# Altium PCB DIO-SMA16-MEZZ.PcbDoc
Units mm, origin at the board's own origin, x right, y up, seen from the top; angles counter-clockwise.
Board outline 65 x 95.5 mm, 4 copper layers (Top Layer, Layer 1, Layer 2, Bottom Layer), stack 0.603 mm thick; 113 components, 66 nets, 358 pads, 139 vias.
Unrouted connection lines stored in the file: 95.
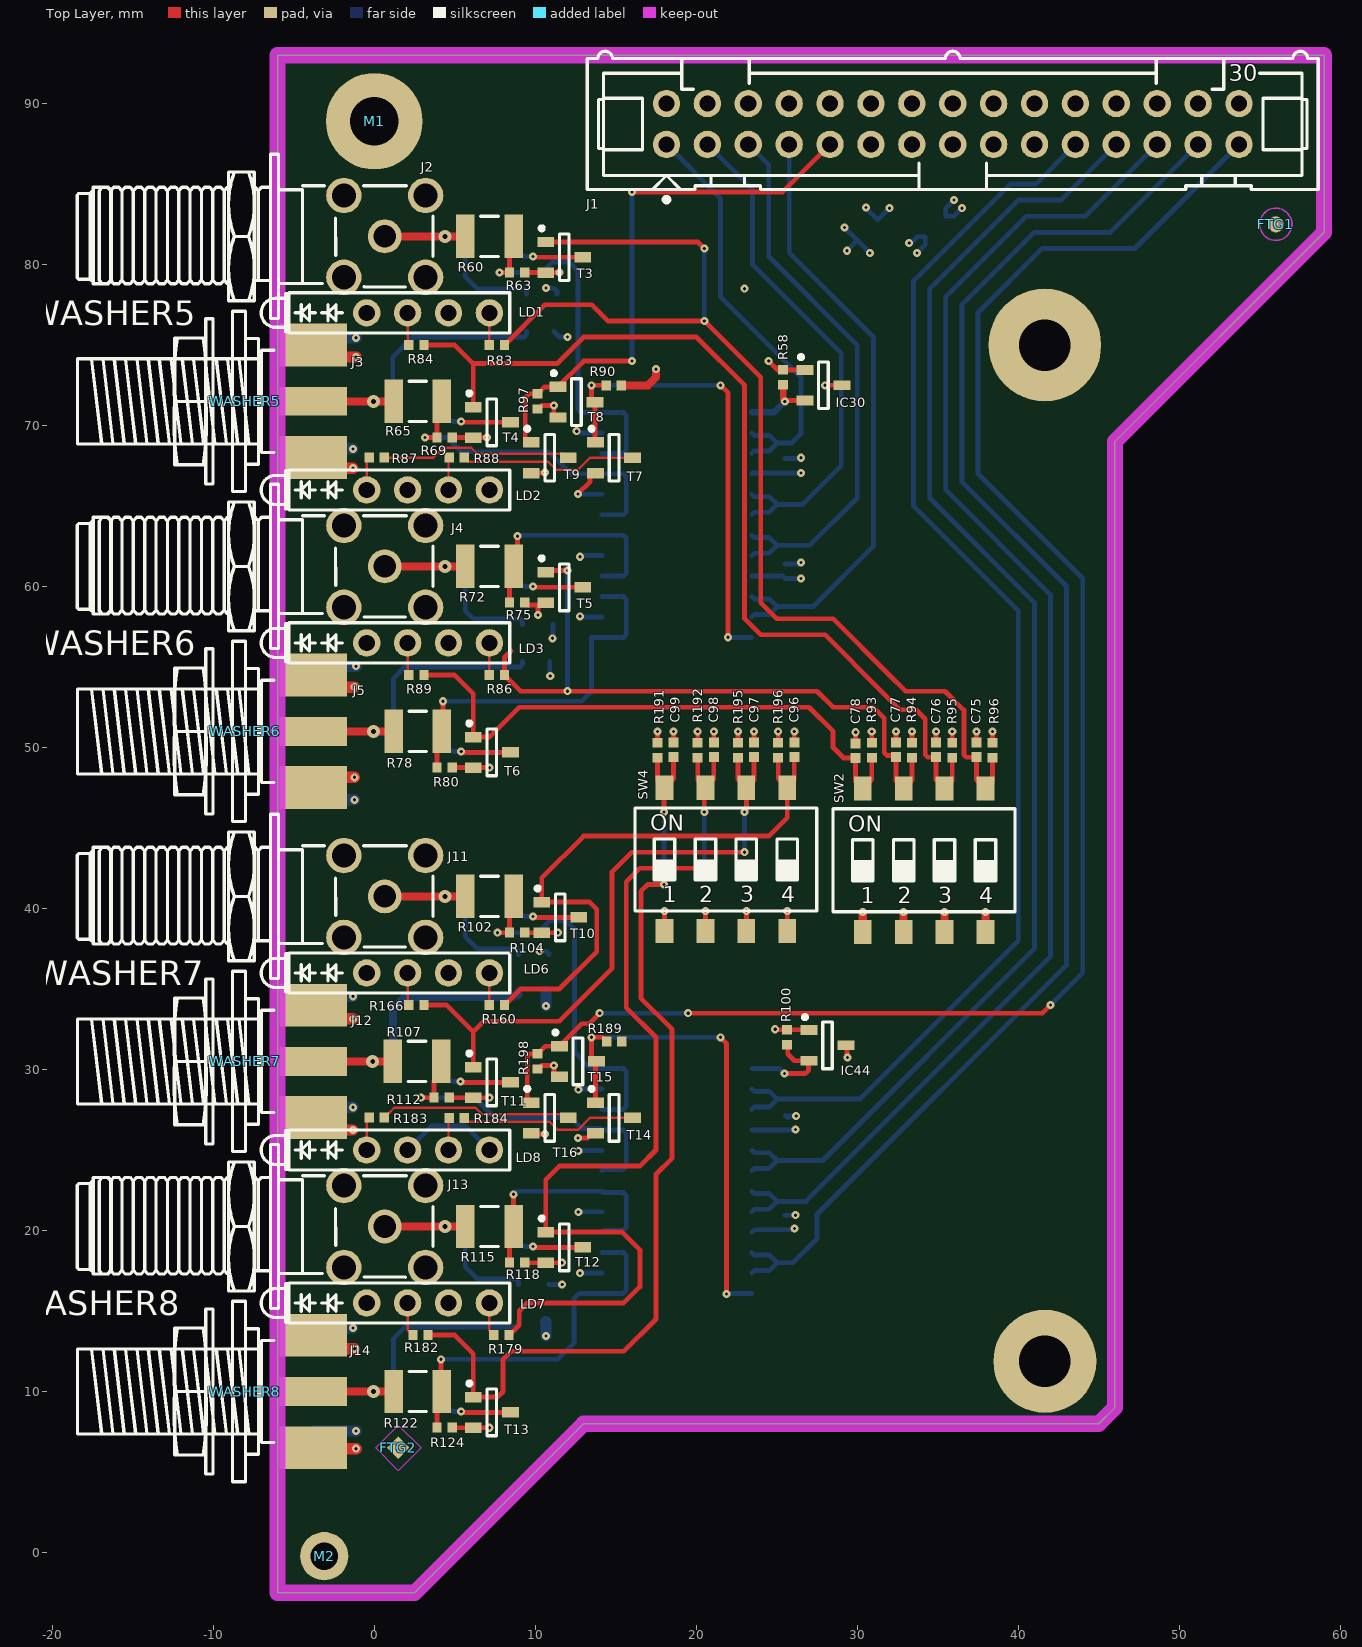
[diagram p0: Top Layer view]
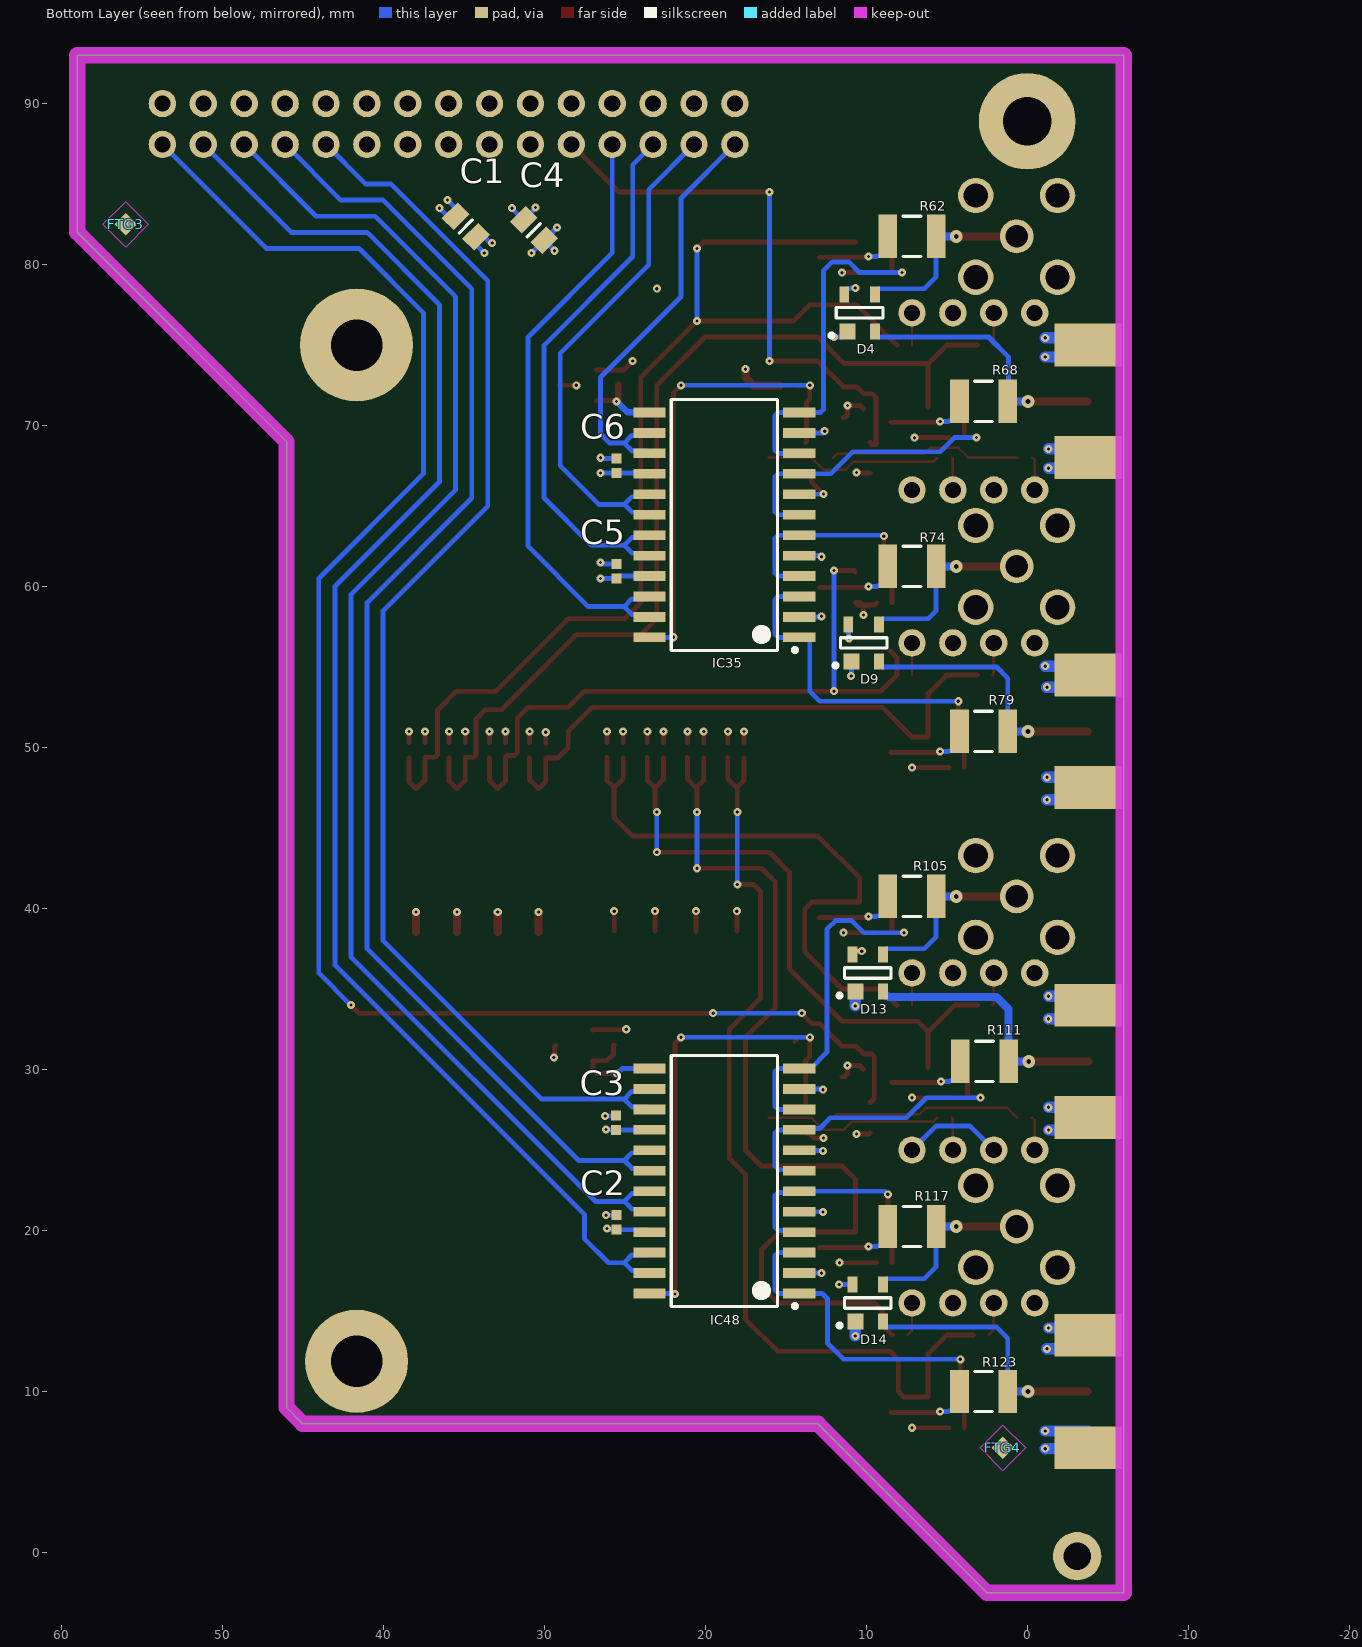
[diagram p1: Bottom Layer view, seen from below]
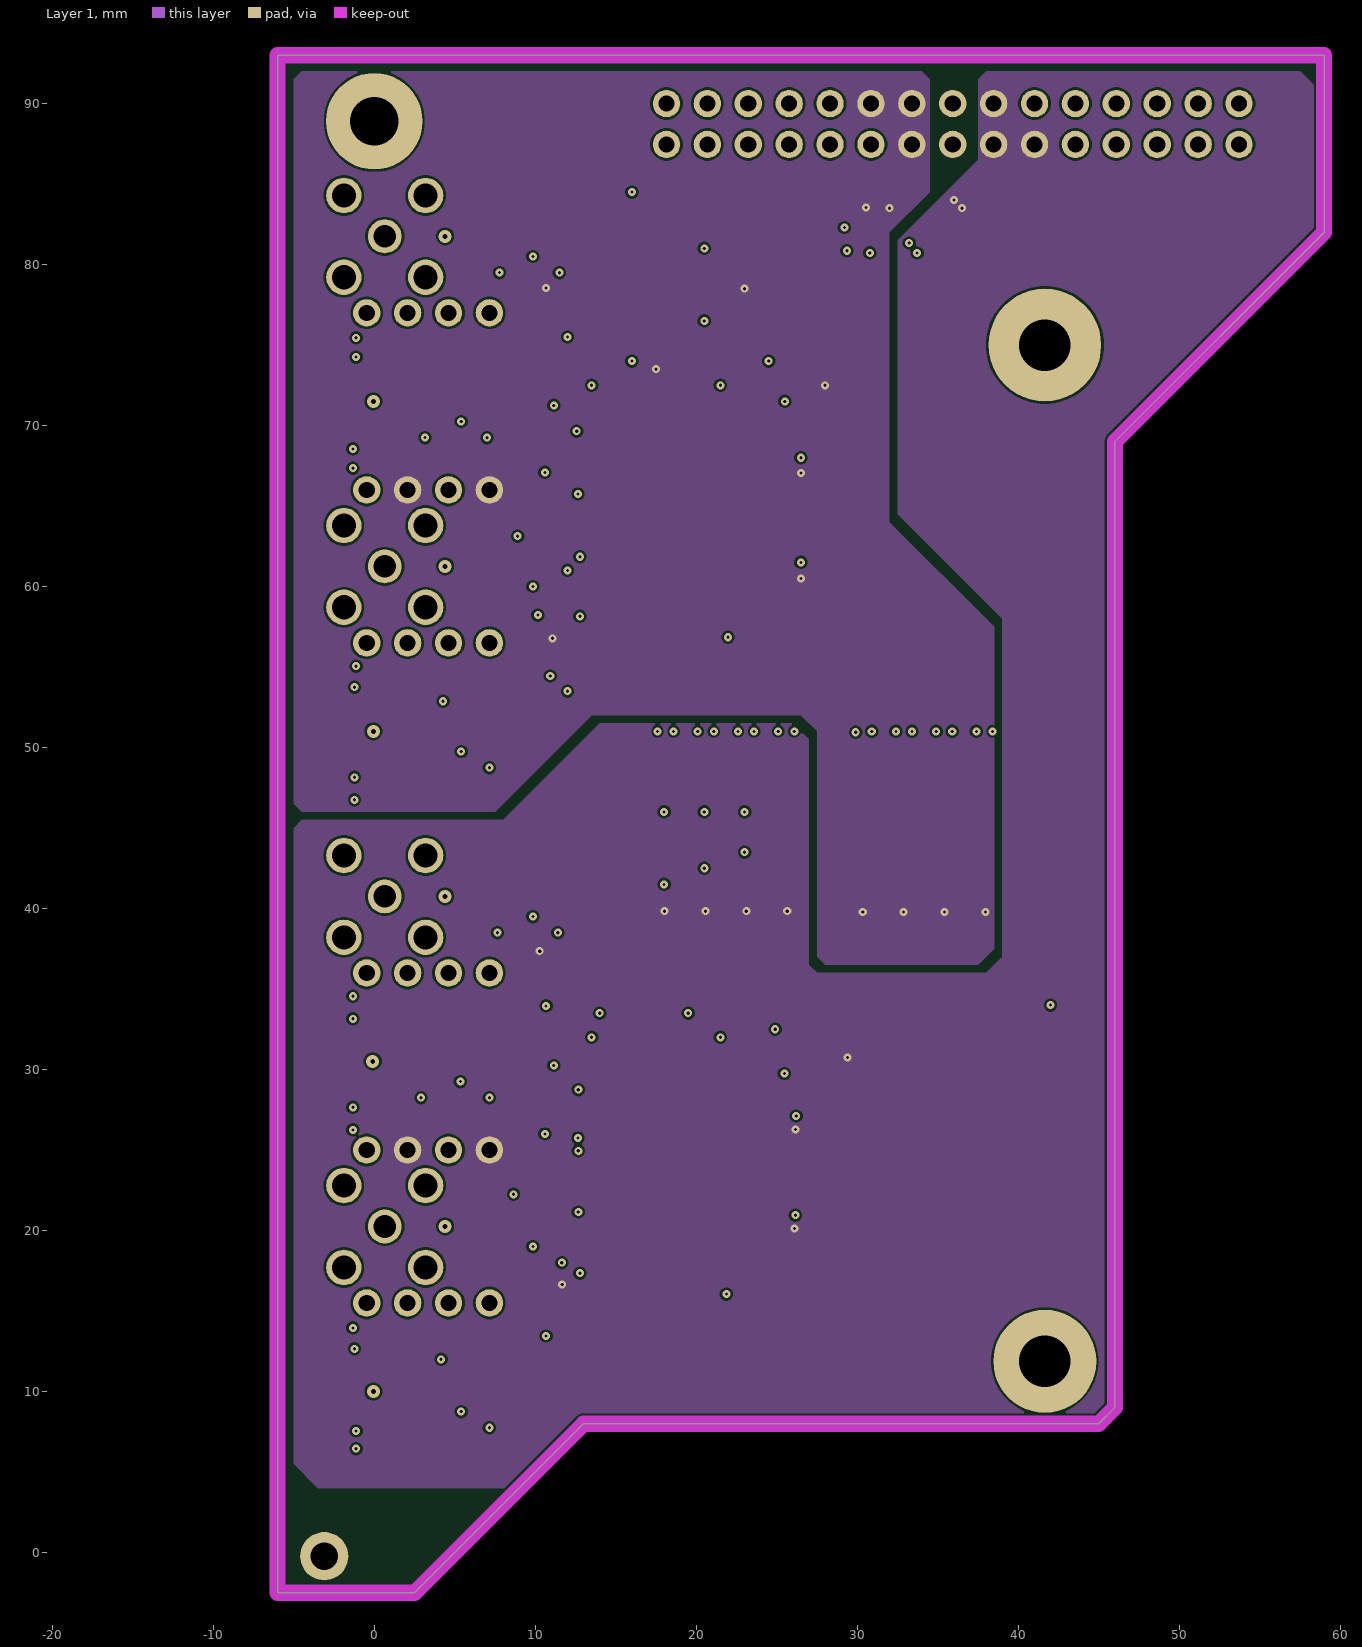
[diagram p2: Layer 1]
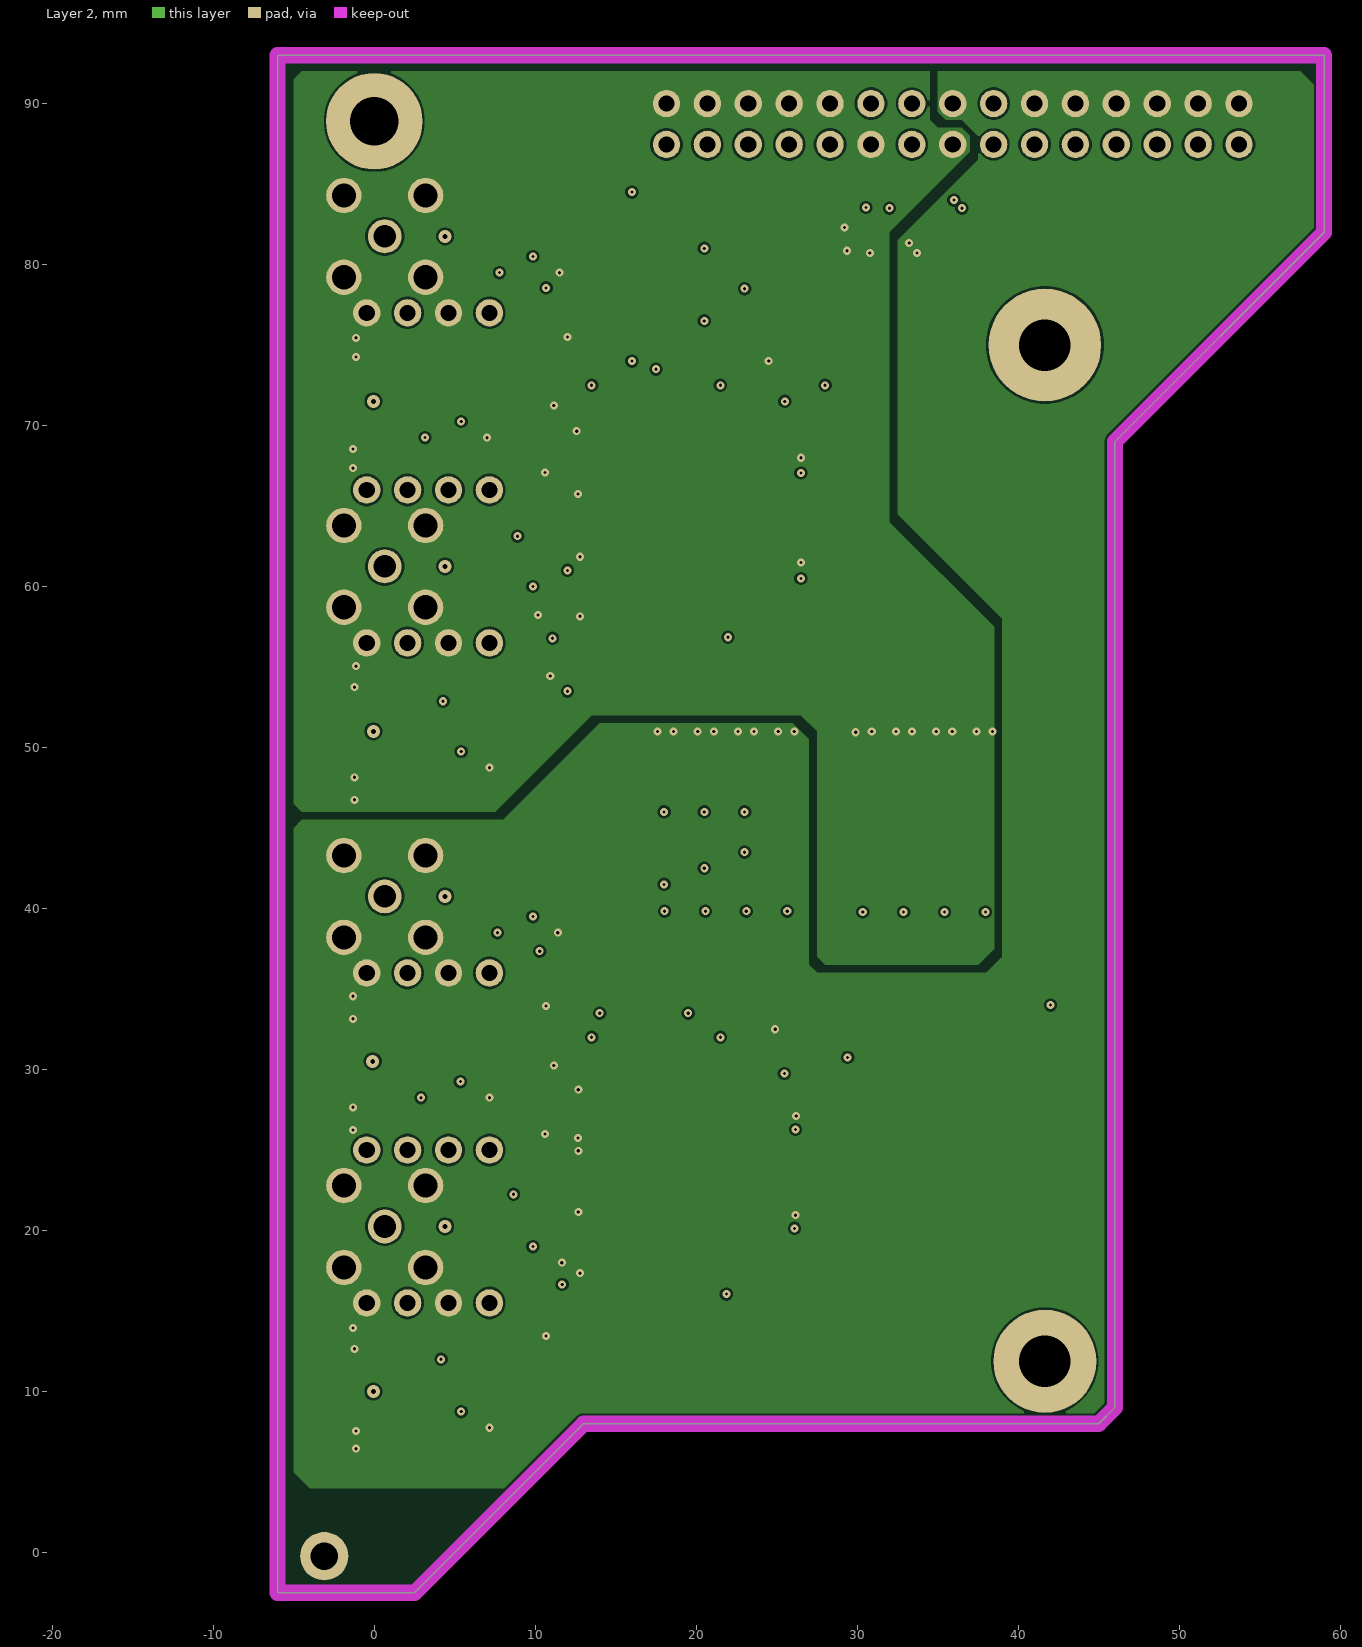
[diagram p3: Layer 2]
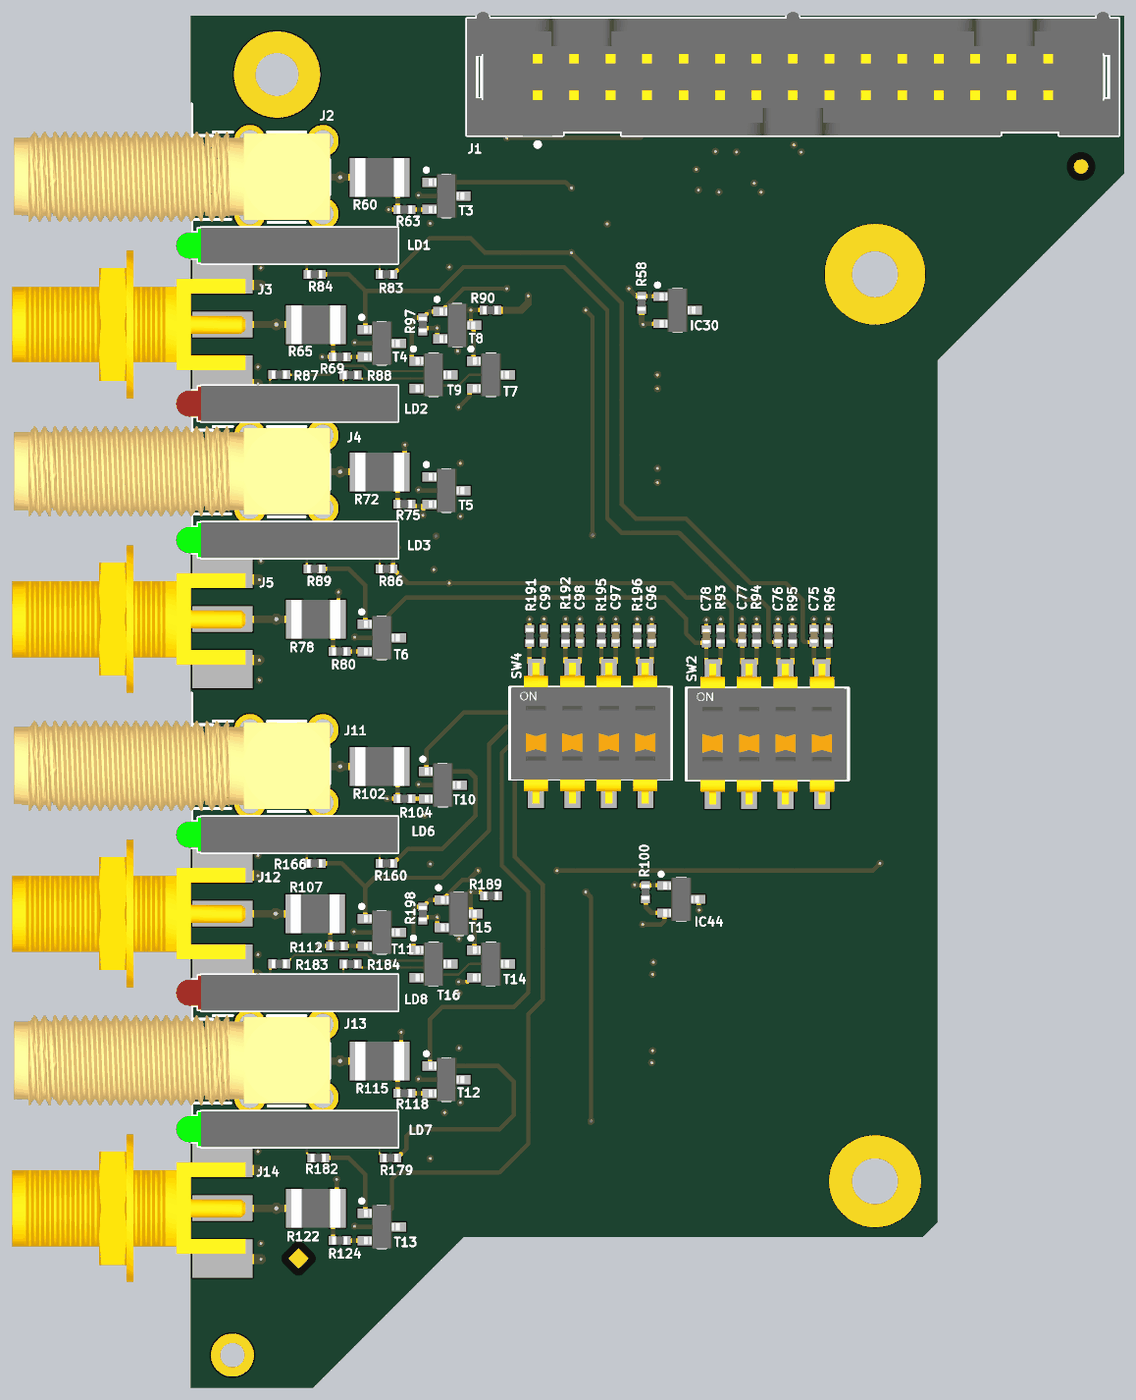
[diagram p4: 3D render of the assembled board from above, using the file's embedded part models]
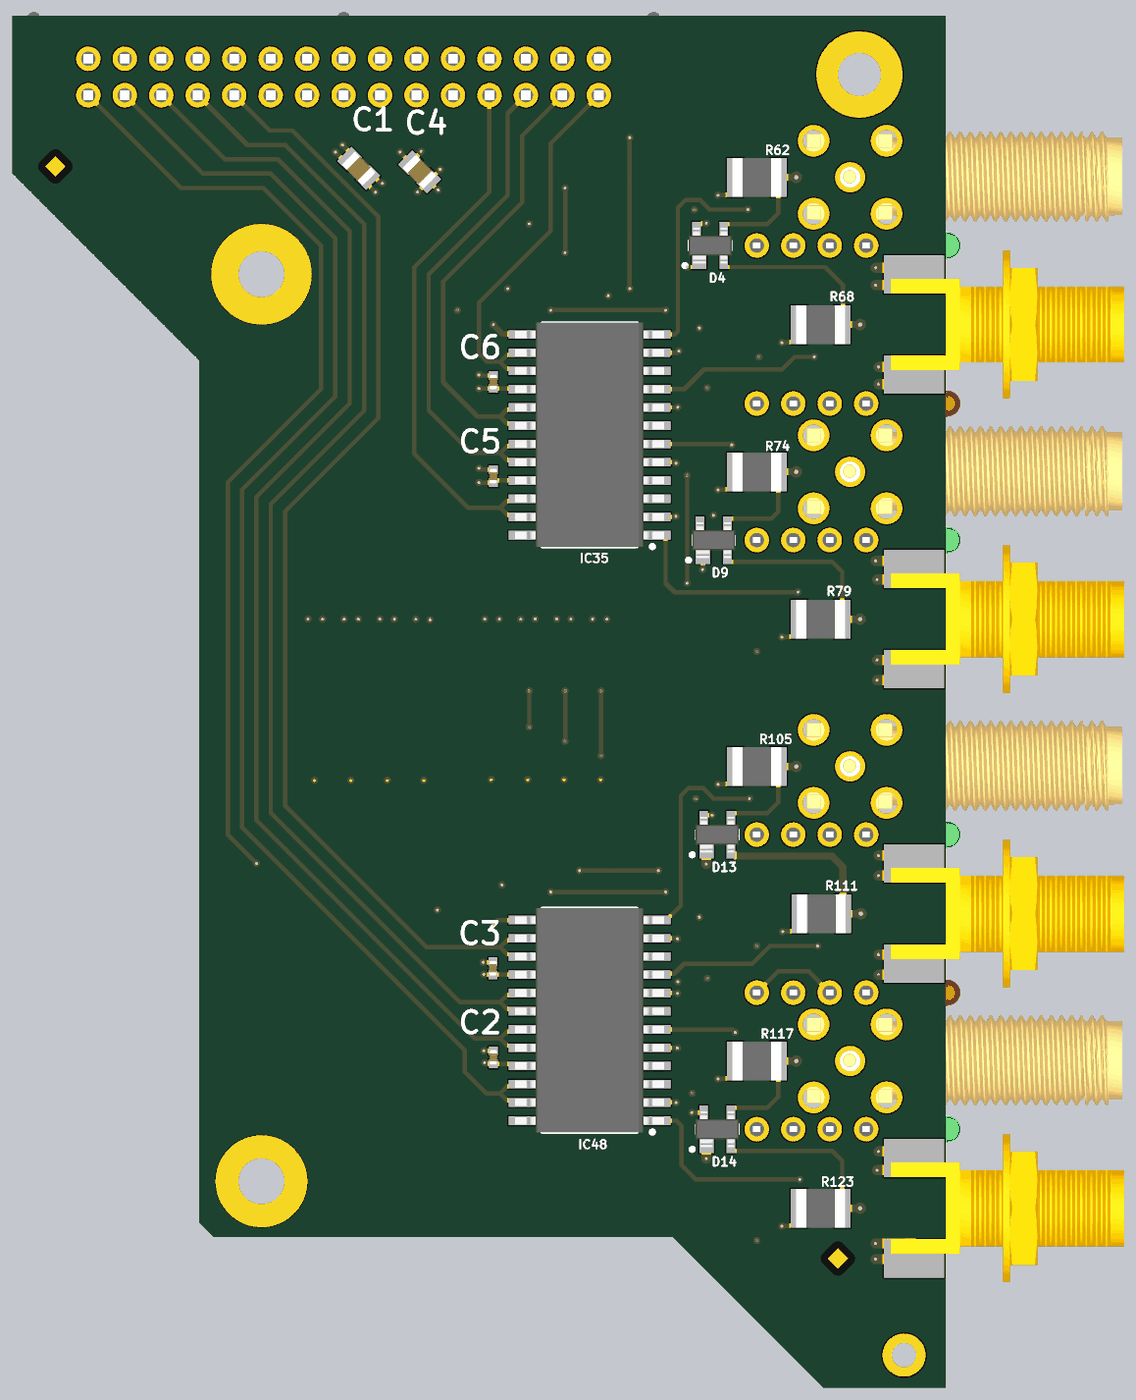
[diagram p5: 3D render of the assembled board from below, using the file's embedded part models]

## Layer stack, top to bottom
Top Solder: solder mask 0.0102, Solder Resist, Dk 3.5
Top Layer: signal copper 0.0356
Dielectric 2: prepreg 0.0711, PP-006, Dk 4.1
Layer 1: signal copper 0.035
Dielectric 1: dielectric 0.32, FR-4, Dk 4.8
Layer 2: signal copper 0.035
Dielectric 3: prepreg 0.0711, PP-006, Dk 4.1
Bottom Layer: signal copper 0.0356
Bottom Solder: solder mask 0.0102, Solder Resist, Dk 3.5

## Board outline
-6,-2.5 -6,93 59,93 59,82 46,69 46,9 45,8 13,8 2.5,-2.5

## Design rules (kind name [scope] priority, off if disabled: settings)
Clearance [All] p1: gap=0.15 ignorepadtopadclearanceinfootprint=FALSE except(0: Arc-Hole Track-Hole SMDPad-Hole THPad-Hole Via-Hole Fill-Hole Poly-Hole Region-Hole Text-Hole)
PolygonConnect [All] p1: thpad.connectstyle=Direct thpad.reliefconductorwidth=0.254 thpad.reliefentries=4 thpad.polygonreliefangle="90 Angle" thpad.airgapwidth=0.254 smdpad.connectstyle=Relief smdpad.reliefconductorwidth=0.254 smdpad.reliefentries=4 smdpad.polygonreliefangle="90 Angle" smdpad.airgapwidth=0.254 via.connectstyle=Direct via.reliefconductorwidth=0.254 via.reliefentries=4 via.polygonreliefangle="90 Angle" via.airgapwidth=0.254
RoutingVias [All] p1: holewidth=0.3 width=0.6 viastyle="Through Hole" minholewidth=0.2 minwidth=0.5 maxholewidth=0.7 maxwidth=1
SolderMaskExpansion [All] p1: expansion=0.102 istentingtop=FALSE
SupplyNets "Schematic Supply Nets_3" [InNet('P5V0_ISO4')] p1: voltage=0.000
SupplyNets "Schematic Supply Nets_2" [InNet('GND_ISO4')] p2: voltage=0.000
SupplyNets "Schematic Supply Nets_1" [InNet('P5V0_ISO3')] p3: voltage=0.000
SupplyNets "Schematic Supply Nets" [InNet('GND_ISO3')] p4: voltage=0.000
Width [All] p1: maxlimit=1 minlimit=0.12 preferedwidth=0.3
30 further rules are at their usual default settings.

## Components (designator, comment, footprint, x,y, rotation, side; value= is the part's Value field where it differs from the comment)
C1 "22uF" CAPC2012X135N 34.864,82.364 r45 bottom
C2 "100nF" CAPC1005X55N 25.5,20.5 r270 bottom
C3 "100nF" CAPC1005X55N 25.528,26.7 r270 bottom
C4 "22uF" CAPC2012X135N 30.636,82.136 r45 bottom
C5 "100nF" CAPC1005X55N 25.5,60.95 r270 bottom
C6 "100nF" CAPC1005X55N 25.5,67.5 r270 bottom
C75 "100nF" CAPC1005X55N 37.4,49.85 r270 top
C76 "100nF" CAPC1005X55N 34.9,49.85 r270 top
C77 "100nF" CAPC1005X55N 32.4,49.85 r270 top
C78 "100nF" CAPC1005X55N 29.9,49.8 r270 top
C96 "100nF" CAPC1005X55N 26.09,49.85 r270 top
C97 "100nF" CAPC1005X55N 23.59,49.85 r270 top
C98 "100nF" CAPC1005X55N 21.09,49.85 r270 top
C99 "100nF" CAPC1005X55N 18.59,49.85 r270 top
D4 "PRTR5V0U2X" SOT190P230X110-4N 10.4,77 r90 bottom
D9 "PRTR5V0U2X" SOT190P230X110-4N 10.15,56.5 r90 bottom
D13 "PRTR5V0U2X" SOT190P230X110-4N 9.9,36 r90 bottom
D14 "PRTR5V0U2X" SOT190P230X110-4N 9.9,15.5 r90 bottom
FTG1 "Use only in PCB" FIDUCIAL_TOP_C100-200 56,82.5 r90 top
FTG2 "Use only in PCB" FIDUCIAL_TOP_S100-200 1.5,6.5 r90 top
FTG3 "Use only in PCB" FIDUCIAL_TOP_S100-200 56,82.5 r90 bottom
FTG4 "Use only in PCB" FIDUCIAL_TOP_S100-200 1.5,6.5 r90 bottom
IC30 "MCP810T-315I/TT" SOT95P237X112-3N 27.9,72.5 r0 top
IC35 "SN74BCT25245DW" SOIC127P1030X265-24N 18.8,63.825 r0 bottom
IC44 "MCP810T-315I/TT" SOT95P237X112-3N 28.15,31.5 r0 top
IC48 "SN74BCT25245DW" SOIC127P1030X265-24N 18.8,23.075 r0 bottom
J1 "" 3M_N2530-6002RB 35.93,88.73 r0 top
J2 "SMA" DELOCK_65848 0.65,81.75 r180 top locked
J3 "SMA" MOLEX_73251-2121 -3.8,71.5 r0 top locked
J4 "SMA" DELOCK_65848 0.65,61.25 r180 top locked
J5 "SMA" MOLEX_73251-2121 -3.8,51 r0 top locked
J11 "SMA" DELOCK_65848 0.65,40.75 r180 top locked
J12 "SMA" MOLEX_73251-2121 -3.8,30.5 r0 top locked
J13 "SMA" DELOCK_65848 0.65,20.25 r180 top locked
J14 "SMA" MOLEX_73251-2121 -3.8,10 r0 top locked
LD1 "Green/Green" LED_DIALIGHT_571-0122F -0.47,77 r0 top locked
LD2 "Red/Green" LED_DIALIGHT_571-0112F -0.47,66 r0 top locked
LD3 "Green/Green" LED_DIALIGHT_571-0122F -0.47,56.5 r0 top locked
LD6 "Green/Green" LED_DIALIGHT_571-0122F -0.47,36 r0 top locked
LD7 "Green/Green" LED_DIALIGHT_571-0122F -0.47,15.5 r0 top locked
LD8 "Red/Green" LED_DIALIGHT_571-0112F -0.47,25 r0 top locked
M1 "Plated Hole" MTG300_600#1 0.568,88.9 r0 top locked
M2 "Plated Hole" MTG300_600#2 -2.539,-0.225 r0 top
R58 "Undefined" RESC1005X40N 25.4,73 r270 top
R60 "30R" RESC3225X70N 7.15,81.75 r0 top
R62 "49R9" RESC3225X70N 7.15,81.75 r180 bottom
R63 "10k" RESC1005X40N 8.87,79.5 r180 top
R65 "30R" RESC3225X70N 2.7,71.5 r0 top
R68 "49R9" RESC3225X70N 2.7,71.5 r180 bottom
R69 "10k" RESC1005X40N 4.37,69.25 r180 top
R72 "30R" RESC3225X70N 7.15,61.25 r0 top
R74 "49R9" RESC3225X70N 7.15,61.25 r180 bottom
R75 "10k" RESC1005X40N 8.87,59 r180 top
R78 "30R" RESC3225X70N 2.7,51 r0 top
R79 "49R9" RESC3225X70N 2.7,51 r180 bottom
R80 "10k" RESC1005X40N 4.37,48.75 r180 top
R83 "510" RESC1005X40N 7.62,75 r180 top
R84 "510" RESC1005X40N 2.62,75 r180 top
R86 "510" RESC1005X40N 7.62,54.5 r180 top
R87 "510" RESC1005X40N 0.155,68.007 r180 top
R88 "510" RESC1005X40N 5.12,68 r180 top
R89 "510" RESC1005X40N 2.62,54.5 r180 top
R90 "10k" RESC1005X40N 14.87,72.5 r0 top
R93 "10k" RESC1005X40N 30.9,49.83 r90 top
R94 "10k" RESC1005X40N 33.4,49.83 r90 top
R95 "10k" RESC1005X40N 35.9,49.83 r90 top
R96 "10k" RESC1005X40N 38.4,49.83 r90 top
R97 "10k" RESC1005X40N 10.15,71.5 r90 top
R100 "Undefined" RESC1005X40N 25.65,32 r270 top
R102 "30R" RESC3225X70N 7.15,40.75 r0 top
R104 "10k" RESC1005X40N 8.87,38.5 r180 top
R105 "49R9" RESC3225X70N 7.15,40.75 r180 bottom
R107 "30R" RESC3225X70N 2.65,30.5 r0 top
R111 "49R9" RESC3225X70N 2.65,30.5 r180 bottom
R112 "10k" RESC1005X40N 4.18,28.25 r180 top
R115 "30R" RESC3225X70N 7.15,20.25 r0 top
R117 "49R9" RESC3225X70N 7.15,20.25 r180 bottom
R118 "10k" RESC1005X40N 8.87,18 r180 top
R122 "30R" RESC3225X70N 2.7,10 r0 top
R123 "49R9" RESC3225X70N 2.7,10 r180 bottom
R124 "10k" RESC1005X40N 4.37,7.75 r180 top
R160 "510" RESC1005X40N 7.62,34 r180 top
R166 "510" RESC1005X40N 2.62,34 r180 top
R179 "510" RESC1005X40N 7.9,13.5 r180 top
R182 "510" RESC1005X40N 2.87,13.5 r180 top
R183 "510" RESC1005X40N 0.155,27.007 r180 top
R184 "510" RESC1005X40N 5.12,27 r180 top
R189 "10k" RESC1005X40N 14.9,31.75 r0 top
R191 "10k" RESC1005X40N 17.59,49.83 r90 top
R192 "10k" RESC1005X40N 20.09,49.83 r90 top
R195 "10k" RESC1005X40N 22.59,49.83 r90 top
R196 "10k" RESC1005X40N 25.09,49.83 r90 top
R198 "10k" RESC1005X40N 10.15,30.5 r90 top
SW2 "Switch" SW_OMRON_A6S-4102-H 34.15,43 r90 top
SW4 "Switch" SW_OMRON_A6S-4102-H 21.84,43.05 r90 top
T3 "BSS138LT1G" SOT95P240X110-3N 11.8,80.45 r0 top
T4 "BSS138LT1G" SOT95P240X110-3N 7.3,70.2 r0 top
T5 "BSS138LT1G" SOT95P240X110-3N 11.8,59.95 r0 top
T6 "BSS138LT1G" SOT95P240X110-3N 7.3,49.7 r0 top
T7 "BSS138LT1G" SOT95P240X110-3N 14.9,68 r0 top
T8 "BSS138LT1G" SOT95P240X110-3N 12.55,71.45 r0 top
T9 "BSS138LT1G" SOT95P240X110-3N 10.9,68 r0 top
T10 "BSS138LT1G" SOT95P240X110-3N 11.55,39.45 r0 top
T11 "BSS138LT1G" SOT95P240X110-3N 7.3,29.2 r0 top
T12 "BSS138LT1G" SOT95P240X110-3N 11.8,18.95 r0 top
T13 "BSS138LT1G" SOT95P240X110-3N 7.3,8.7 r0 top
T14 "BSS138LT1G" SOT95P240X110-3N 14.9,27 r0 top
T15 "BSS138LT1G" SOT95P240X110-3N 12.65,30.5 r0 top
T16 "BSS138LT1G" SOT95P240X110-3N 10.9,27 r0 top
WASHER5 "D11.1xd6.6" Keystone_7687 -8,71.5 r180 top
WASHER6 "D11.1xd6.6" Keystone_7687 -8,51 r180 top
WASHER7 "D11.1xd6.6" Keystone_7687 -8,30.5 r180 top
WASHER8 "D11.1xd6.6" Keystone_7687 -8,10 r180 top

## Footprints (in the part's own frame and the unit in brackets; to place one, negate y for a bottom-side part, rotate by r counter-clockwise, add the part's x,y. Pads: shape width x height; smd on the part's side, far side on the other; paste and mask are expansions set on the pad)
3M_N2530-6002RB [mm] "30 Contacts - Straight .100\" x .100\" Low Profile Four-Wall Header"
  round 1.7 hole 1: 1(-17.78,-1.27) 2(-17.78,1.27) 3(-15.24,-1.27) 4(-15.24,1.27) 5(-12.7,-1.27) 6(-12.7,1.27) 7(-10.16,-1.27) 8(-10.16,1.27) 9(-7.62,-1.27) 10(-7.62,1.27) 11(-5.08,-1.27) 12(-5.08,1.27) 13(-2.54,-1.27) 14(-2.54,1.27) 15(0,-1.27) 16(0,1.27) 17(2.54,-1.27) 18(2.54,1.27) 19(5.08,-1.27) 20(5.08,1.27) 21(7.62,-1.27) 22(7.62,1.27) 23(10.16,-1.27) 24(10.16,1.27) 25(12.7,-1.27) 26(12.7,1.27) 27(15.24,-1.27) 28(15.24,1.27) 29(17.78,-1.27) 30(17.78,1.27)
  silkscreen extent -22.71,-4.85 22.71,4.52, body extent -22.71,-4.11 22.71,4.52, height 9.91
CAPC1005X55N [mm] "Capacitor, Non-Polarized, Chip; 1.00mm L X 0.50mm W X 0.70mm H, IPC Medium Density"
  rect 0.62x0.62 smd: 1(-0.45,0) 2(0.45,0)
  body extent -0.52,-0.27 0.53,0.28, height 0.55
CAPC2012X135N [mm] "Chip Capacitor, Body 2.0x1.25mm, IPC Medium Density"
  rect 1.05x1.4 smd: 1(-0.9,0) 2(0.9,0)
  silkscreen extent 0,-0.58 0,0.58, body extent -1.05,-0.67 1.05,0.68, height 1.25
DELOCK_65848 [mm] "50 Ohm Through Hole SMA Right Angle PCB Jack"
  round 2.1 hole 1.4: 1(0,0)
  round 2.2 hole 1.5: 2(-2.54,2.54) 2(-2.54,-2.54) 2(2.54,2.54) 2(2.54,-2.54)
  silkscreen extent -3,-5.1 19.1,5.1, body extent -3.04,-3.17 18.96,3.09, height 9.15
FIDUCIAL_TOP_C100-200 [mm] "Round Fiducial Target, Top Layer, 1.0mm, Top Solder 2.0mm, Keepout =2.0mm"
  round 1 smd paste-0.51 mask+0.5: FTG2(0,0)
  Top Layer keep-out circle w0.1: c0,0 r1
FIDUCIAL_TOP_S100-200 [mm] "Square Fiducial Target, Top Layer, 1.0mm, Top Solder 2.0mm, Keepout =2.0mm"
  rect 1x1 smd rot 45 paste-0.51 mask+0.5: 1(0,0)
  Top Layer keep-out region: 1.414,0 0,-1.414 -1.414,0 0,1.414
Keystone_7687 [mm] "Polyphenylene Sulfide PPS Shoulder Washer"
  silkscreen extent -0.8,-5.6 0.8,5.6
LED_DIALIGHT_571-0112F [mm] "2x 2mm LED (Top: Red, Bot: Green) PCB Edge Mounting (Without positioning pins) DIALIGHT 571 Serie"
  round 1.7 hole 1: 1(0,0) 2(2.54,0) 3(5.08,0) 4(7.62,0)
  silkscreen extent -6.55,-1.24 8.89,1.24, body extent -6.55,-1.24 8.89,1.24, height 8.61
LED_DIALIGHT_571-0122F [mm] "2x 2mm LED (Top: Green, Bot: Green) PCB Edge Mounting (Without positioning pins) DIALIGHT 571 Serie"
  round 1.7 hole 1: 1(0,0) 2(2.54,0) 3(5.08,0) 4(7.62,0)
  silkscreen extent -6.55,-1.24 8.89,1.24, body extent -6.55,-1.24 8.89,1.24, height 8.61
MOLEX_73251-2121 [mm] "50 Ohm, SMA Edge Mount PCB, With Jam Nut And Lock Washer"
  rect 4.19x1.78 smd: 1(0,0)
  rect 4.19x2.665 smd: 2(0,-3.492) 2(0,3.492)
  rect 4.19x2.665 smd far side: 2(0,-3.492) 2(0,3.492)
  silkscreen extent -14.64,-5.13 -2.44,5.13, body extent -14.64,-5.13 1.62,5.13, height 5.76
MTG300_600#1 [mm] "Plated Through Hole: Hole Dia.=3.0mm Pad Dia.=6.0mm"
  round 6 hole 3: 1(-0.568,0)
MTG300_600#2 [mm] "Plated Through Hole: Hole Dia.=3.0mm Pad Dia.=6.0mm"
  round 3 hole 1.7: 1(-0.568,0)
RESC1005X40N [mm] "Chip Resistor, EIA 0402, Metric 1005, Body 1.0x0.5mm, IPC Medium Density"
  rect 0.58x0.62 smd: 1(-0.47,0) 2(0.47,0)
  body extent -0.52,-0.27 0.53,0.28, height 0.4
RESC3225X70N [mm] "Chip Resistor, EIA 1210, Metric 3225, Body 3.2x2.5mm, IPC Medium Density"
  rect 1.15x2.7 smd: 1(-1.5,0) 2(1.5,0)
  silkscreen extent -0.55,-1.25 0.55,1.25, body extent -1.7,-1.35 1.7,1.35, height 0.7
SOIC127P1030X265-24N [mm] "SOIC 24, Pitch 1.27mm - Body 7.6x15.6mm, IPC Medium Density"
  rect 2x0.6 smd: 1(-4.65,6.985) 2(-4.65,5.715) 3(-4.65,4.445) 4(-4.65,3.175) 5(-4.65,1.905) 6(-4.65,0.635) 7(-4.65,-0.635) 8(-4.65,-1.905) 9(-4.65,-3.175) 10(-4.65,-4.445) 11(-4.65,-5.715) 12(-4.65,-6.985) 13(4.65,-6.985) 14(4.65,-5.715) 15(4.65,-4.445) 16(4.65,-3.175) 17(4.65,-1.905) 18(4.65,-0.635) 19(4.65,0.635) 20(4.65,1.905) 21(4.65,3.175) 22(4.65,4.445) 23(4.65,5.715) 24(4.65,6.985)
  silkscreen extent -4.5,-7.8 3.3,7.9, body extent -5.18,-7.8 5.18,7.8, height 1.68
SOT95P237X112-3N [mm] "SOT, 0.95mm, pitch; 3 pin,1.30mm W X 2.92mm L X 1.12mm H body, IPC Medium Density"
  rect 1.05x0.6 smd: 1(-1.15,0.95) 2(-1.15,-0.95) 3(1.15,0)
  silkscreen extent -1.52,-1.45 0.3,1.87, body extent -1.25,-1.5 1.25,1.5, height 1.1
SOT95P240X110-3N [mm] "SOT23 3-Leads, Pitch 0.95mm, Body 1.3x2.9mm, IPC Medium Density"
  rect 1.05x0.65 smd: 1(-1.15,0.95) 2(-1.15,-0.95) 3(1.15,0)
  silkscreen extent -1.52,-1.45 0.3,1.92, body extent -1.25,-1.5 1.25,1.5, height 1.1
SOT190P230X110-4N [mm] "SOT143, SOT, 1.90mm Pitch; 4 Pin, 1.30mm W X 2.90mm L X 1.10mm H body, IPC Medium Density"
  rect 1x1 smd: 1(-1.15,0.75)
  rect 1x0.6 smd: 2(-1.15,-0.95) 3(1.15,-0.95) 4(1.15,0.95)
  silkscreen extent -1.52,-1.45 0.33,1.88, body extent -1.25,-1.5 1.25,1.5, height 1.1
SW_OMRON_A6S-4102-H [mm] "Pitch 2.54mm, Body 11.3x6.4mm, 4 Ways SPST Surface-Mounting DIP Switch, OMRON A6S-H"
  rect 1.5x1.1 smd: 1(-4.45,3.81) 2(-4.45,1.27) 3(-4.45,-1.27) 4(-4.45,-3.81) 5(4.45,-3.81) 6(4.45,-1.27) 7(4.45,1.27) 8(4.45,3.81)
  silkscreen extent -3.2,-5.65 3.2,5.65, body extent -4.9,-5.55 4.9,5.55, height 3.97

## Part data
C1 C4: library part CC0805_22UF_16V_10%_X5R, "Non-polarised capacitor", Case=0805, Manufacturer=GENERIC, Manufacturer1 ComponentHeight=1.35mm, Manufacturer1 Example=TDK, Manufacturer1 Part Number=C2012X5R1C226KT, Tolerance=±10%, Voltage=16V, Author="CERN DEM JLC", Component Type=Standard, CreateDate=25.10.2012, HelpURL=\\cern.ch\dfs\Applications\Altium\Datasheets\CC0805_X5R_TDK_C.pdf, LatestRevisionDate=25.10.2012, Manufacturer Part Number=CC0805_22UF_16V_10%_X5R, Mounted=Yes, Part Description="SMD Multilayer Chip Ceramic Capacitor", Part Number=CC0805_22UF_16V_10%_X5R, Pin Count=2, Sense=No, SMD=Yes, Socket=No, Status=Preferred, TC=X5R
C2 C3 C5 C6 C75 C76 C77 C78 C96 C97 C98 C99: library part CC0402_100NF_16V_10%_X5R, "Non-polarised capacitor", Case=0402, Manufacturer=GENERIC, Manufacturer1 ComponentHeight=0.55mm, Manufacturer1 Example=MURATA, Manufacturer1 Part Number=GRM155R61C104KA88D, Tolerance=±10%, Voltage=16V, Author="CERN DEM JLC", Component Type=Standard, CreateDate=10.12.2013, HelpURL=\\cern.ch\dfs\Applications\Altium\Datasheets\CC0402_X5R_MURATA_GRM.pdf, LatestRevisionDate=10.12.2013, Manufacturer Part Number=CC0402_100NF_16V_10%_X5R, Mounted=Yes, Part Description="SMD Multilayer Chip Ceramic Capacitor", Part Number=CC0402_100NF_16V_10%_X5R, Pin Count=2, Sense=No, SMD=Yes, Socket=No, Status=None, TC=X5R
D4 D9 D13 D14: "Ultra Low Capacitance Double Rail-to-Rail ESD Protection Diode", Case=SOT143B, Manufacturer="NXP SEMICONDUCTORS", Voltage=5.5V, Author="CERN DEM JLC", Bonding=No, Component Type=Standard, ComponentHeight=1.1mm, CreateDate=22.03.2011, Device=PRTR5V0U2X, HelpURL=\\cern.ch\dfs\Applications\Altium\Datasheets\PRTR5V0U2X.pdf, LatestRevisionDate=22.03.2011, Manufacturer Part Number=PRTR5V0U2X, Mounted=Yes, PackageDescription="SOT143B, SOT, 1.90mm Pitch; 4 Pin, 1.30mm W X 2.90mm L X 1.10mm H body, IPC Medium Density", Part Description="Ultra Low Capacitance (1pF) Double Rail-to-Rail ESD Protection Diode (8kV)", Part Number=PRTR5V0U2X, Pin Count=4, PressFit=No, Sense=No, SMD=Yes, Socket=No
FTG1: library part FIDUCIAL_TARGET_C100-200, "Fiducial Target", Author="CERN DEM JLC", Component Type="Standard (No BOM)", ComponentHeight=0mm, CreateDate=09.02.2010, Family=Fiducial, HelpURL=Undefined, LatestRevisionDate=04.04.2012, Mounted=No, PackageDescription="Round Fiducial Target, Top Layer, 1.0mm, Top Solder 2.0mm, Keepout =2.0mm", Part Description="Round Fiducial Target, Top Layer, 1.0mm, Top Solder 2.0mm, Keepout =2.0mm", Part Number=FIDUCIAL_TARGET_C100-200, Pin Count=1, Sense=No, SMD=Yes, Socket=No, Status=None
FTG2 FTG3 FTG4: library part FIDUCIAL_TARGET_S100-200, "Fiducial Target", Author="CERN DEM JLC", Component Type="Standard (No BOM)", ComponentHeight=0mm, CreateDate=09.02.2010, Family=Fiducial, HelpURL=Undefined, LatestRevisionDate=04.04.2012, Mounted=No, PackageDescription="Square Fiducial Target, Top Layer, 1.0mm, Top Solder 2.0mm, Keepout =2.0mm", Part Description="Square Fiducial Target, Top Layer, 1.0mm, Top Solder 2.0mm, Keepout =2.0mm", Part Number=FIDUCIAL_TARGET_S100-200, Pin Count=1, Sense=No, SMD=Yes, Socket=No, Status=None
IC30 IC44: library part VMON_MCP810, "3.075V Microcontroller Supervisory Circuit With Push-Pull Output", Case=SOT23, Manufacturer="MICROCHIP TECHNOLOGY", Author=GK, Bonding=No, Component Type=Standard, ComponentHeight=1.12mm, CreateDate=16.06.2011, Device=MCP810T-315I/TT, HelpURL=\\cern.ch\dfs\Applications\Altium\Datasheets\MCP809T-315I-TT.pdf, LatestRevisionDate=16.06.2011, Manufacturer Part Number=MCP810T-315I/TT, Mounted=Yes, PackageDescription="SOT, 0.95mm, pitch; 3 pin,1.30mm W X 2.92mm L X 1.12mm H body, IPC Medium Density", Part Description="3.075V Microcontroller Supervisory Circuit With Push-Pull Output", Part Number=MCP810T-315I/TT, Pin Count=3, PressFit=No, Sense=No, SMD=Yes, Socket=No
IC35 IC48: "25 Ohms Octal Bus Transceiver With 3-State Outputs", Case=SOIC24, Manufacturer="TEXAS INSTRUMENTS", Author="CERN DEM JLC", Bonding=No, Component Type=Standard, ComponentHeight=2.65mm, CreateDate=09.11.2009, Device=SN74BCT25245DW, HelpURL=\\cern.ch\dfs\Applications\Altium\Datasheets\SN74BCT25245DW.pdf, LatestRevisionDate=09.11.2009, Manufacturer Part Number=SN74BCT25245DW, Mounted=Yes, PackageDescription="SOIC 24, Pitch 1.27mm - Body 7.6x15.6mm, IPC Medium Density", Part Description="25 Ohms Octal Bus Transceiver With 3-State Outputs", Part Number=SN74BCT25245DW, Pin Count=24, PressFit=No, Sense=No, SMD=Yes, Socket=No
J1: library part 3M_N2530-6002RB, "Connector 30 Male", Manufacturer=3M, Manufacturer Part Number=N2530-6002RB, Author="CERN DEM JLC", Component Type=Standard, ComponentHeight=10.03mm, CreateDate=11.02.2009, Family="Header 30", HelpURL=\\cern.ch\dfs\Applications\Altium\Datasheets\3M_N2530-6002RB.pdf, LatestRevisionDate=11.08.2009, Mounted=Yes, Part Description="30 Contacts - Straight .100'' x .100'' Low Profile Four-Wall Header, 2500 Series", Part Number=3M_N2530-6002RB, Pin Count=30, PressFit=No, Sense=No, SMD=No, Socket=No, Status=None
J2 J4 J11 J13: library part DELOCK_65848, "50 Ohm Through Hole SMA Right Angle PCB Jack", Manufacturer=DELOCK, Manufacturer Part Number="5848 (4043619658480)", Author=GK, Component Type=Standard, ComponentHeight=12.5, CreateDate=13.05.2019, Family=SMA, HelpURL=\\cern.ch\dfs\Applications\Altium\Datasheets\AMPHENOL_132203-16.pdf, LatestRevisionDate=13.05.2019, Mounted=Yes, Part Description="50 Ohm Through Hole SMA Right Angle PCB Jack", Part Number=DELOCK_65848, Pin Count=5, PressFit=No, Sense=No, SMD=No, Socket=No, Status=None
J3 J5 J12 J14: library part MOLEX_73251-2121, Manufacturer=MOLEX, Manufacturer Part Number=73251-2121, Author="CERN DEM JLC", Component Type=Standard, ComponentHeight=5.75mm, CreateDate=26.10.2016, Family=SMA, HelpURL=\\cern.ch\dfs\Applications\Altium\Datasheets\MOLEX_73251-2121.pdf, LatestRevisionDate=27.03.2017, Mounted=Yes, Part Description="50 Ohms SMA Edge Mount PCB, With Jam Nut And Lock Washer", Part Number=MOLEX_73251-2121, Pin Count=5, PressFit=No, Sense=No, SMD=No, Socket=No, Status=None
LD1 LD3 LD6 LD7: library part LED_DIALIGHT_571-0122F, "LED x2 Green 1C2A-BOT_3C4A-TOP", Manufacturer=DIALIGHT, Manufacturer Part Number=571-0122F, Author="CERN DEM JLC", Bonding=No, Color=Green/Green, Component Type=Standard, ComponentHeight=8.6mm, CreateDate=09.11.2009, HelpURL=\\cern.ch\dfs\Applications\Altium\Datasheets\LED_DIALIGHT_571-0122F.pdf, LatestRevisionDate=17.03.2010, Mounted=Yes, PackageDescription="2x 2mm Red LED PCB Edge Mounting (Without positioning pins) DIALIGHT 571 Serie", Part Description="Dual 2mm Green LEDs CBI® Circuit Board Indicator (Without positioning pins)", Part Number=LED_DIALIGHT_571-0122F, Pin Count=4, PressFit=No, Sense=No, SMD=No, Socket=No
LD2 LD8: library part LED_DIALIGHT_571-0112F, "2x LED  Botom Green, Top Red", Manufacturer=DIALIGHT, Manufacturer Part Number=571-0112F, Author="CERN DEM JLC", Bonding=No, Color=Red/Green, Component Type=Standard, ComponentHeight=8.6mm, CreateDate=09.11.2009, HelpURL=\\cern.ch\dfs\Applications\Altium\Datasheets\LED_DIALIGHT_571-0112F.pdf, LatestRevisionDate=17.03.2010, Mounted=Yes, PackageDescription="2x 2mm LED (Top: Red, Bot: Green) PCB Edge Mounting (Without positioning pins) DIALIGHT 571 Serie", Part Description="Dual 2mm  LEDs, Red Top,Green Bot, CBI® Circuit Board Indicator (Without positioning pins)", Part Number=LED_DIALIGHT_571-0112F, Pin Count=4, PressFit=No, Sense=No, SMD=No, Socket=No
M1 M2: library part PLATED_HOLE3.0_PAD6.0, "Single Terminal Socket", Author="CERN DEM JLC", Component Type="Standard (No BOM)", ComponentHeight=0mm, CreateDate=26.05.2008, Family="Plated Hole", LatestRevisionDate=26.05.2008, Mounted=No, PackageDescription="Plated Through Hole: Hole Dia.=3.0mm Pad Dia.=6.0mm", Part Description="Plated Through Hole: Hole Dia.=3.0mm Pad Dia.=6.0mm", Part Number=PLATED_HOLE3.0_PAD6.0, Pin Count=1, SMD=No, Socket=No, Status=None, Table=Pads
R58 R100: library part R0402_NO-VALUE, "Resistor", Case=0402, Author="CERN DEM JLC", Component Type=Standard, CreateDate=03.12.2007, HelpURL=Undefined, LatestRevisionDate=13.03.2008, Manufacturer=Undefined, Manufacturer1 ComponentHeight=Undefined, Manufacturer1 Example=Undefined, Manufacturer1 Part Number=Undefined, Manufacturer Part Number=R0402_NO-VALUE, Mounted=No, Part Description="Reserved Footprint For a 0402 (1005) Chip Resistor", Part Number=R0402_NO-VALUE, Pin Count=2, PressFit=No, Sense=No, SMD=Yes, Socket=No, Status=None
R60 R65 R72 R78 R102 R107 R115 R122: library part R1210_30R_5%_0.5W_200PPM, "Resistor - 5%", Case=1210, Manufacturer=VISHAY, Manufacturer Part Number=CRCW121030R0JNEA, Part Number=R1210_30R_5%_0.5W_200ppm, Power=0.5W, Tolerance=±5%, Author="CERN DEM JMW", Component Type=Standard, ComponentHeight=0.6mm, CreateDate=06.08.2014, HelpURL=\\cern.ch\dfs\Applications\Altium\Datasheets\R1210_VISHAY_CRCW1210.pdf, LatestRevisionDate=06.08.2014, Mounted=Yes, Part Description="Thick Film Chip Resistor", Pin Count=2, PressFit=No, Sense=No, SMD=Yes, Socket=No, Status=None, TC=±200ppm/°C
R62 R68 R74 R79 R105 R111 R117 R123: library part R1210_49R9_1%_0.5W_100PPM_VISHAY_CRCW, "Resistor - 1%", Case=1210, Manufacturer="VISHAY DRALORIC", Manufacturer Part Number=CRCW121049R9FKTA, Power=0.5W, Tolerance=±1%, Author="CERN DEM JMW", Component Type=Standard, ComponentHeight=0.6mm, CreateDate=06.08.2014, HelpURL=\\cern.ch\dfs\Applications\Altium\Datasheets\R1210_VISHAY_CRCW1210.pdf, LatestRevisionDate=06.08.2014, Mounted=Yes, Part Description="Thick Film Chip Resistor", Part Number=R1210_49R9_1%_0.5W_100PPM_VISHAY_CRCW, Pin Count=2, Sense=No, SMD=Yes, Socket=No, Status=None, TC=±100ppm/°C
R63 R69 R75 R80 R90 R93 R94 R95 R96 R97 R104 R112 R118 R124 R189 R191 R192 R195 R196 R198: library part R0402_10K_1%_0.0625W_100PPM, "Resistor - 1%", Case=0402, Manufacturer=GENERIC, Manufacturer1 ComponentHeight=0.4mm, Manufacturer1 Example="YAGEO PHYCOMP", Manufacturer1 Part Number=232270671003L, Power=0.0625W, Tolerance=±1%, Author="CERN DEM JLC", Component Type=Standard, CreateDate=03.12.2007, HelpURL=\\cern.ch\dfs\Applications\Altium\Datasheets\R0402_Phycomp_RC0402.pdf, LatestRevisionDate=17.10.2012, Manufacturer Part Number=R0402_10K_1%_0.0625W_100PPM, Mounted=Yes, Part Description="General Purpose Thick Film Chip Resistor", Part Number=R0402_10K_1%_0.0625W_100PPM, Pin Count=2, Sense=No, SMD=Yes, Socket=No, Status="Not recommended", TC=±100ppm/°C
R83 R84 R86 R87 R88 R89 R160 R166 R179 R182 R183 R184: library part R0402_510R_1%_0.0625W_100PPM, "Resistor - 1%", Case=0402, Manufacturer=GENERIC, Manufacturer1 ComponentHeight=0.4mm, Manufacturer1 Example="YAGEO PHYCOMP", Manufacturer1 Part Number=232270675101L, Power=0.0625W, Tolerance=±1%, Author="CERN DEM JLC", Component Type=Standard, CreateDate=03.12.2007, HelpURL=\\cern.ch\dfs\Applications\Altium\Datasheets\R0402_Phycomp_RC0402.pdf, LatestRevisionDate=17.10.2012, Manufacturer Part Number=R0402_510R_1%_0.0625W_100PPM, Mounted=Yes, Part Description="General Purpose Thick Film Chip Resistor", Part Number=R0402_510R_1%_0.0625W_100PPM, Pin Count=2, Sense=No, SMD=Yes, Socket=No, Status="Not recommended", TC=±100ppm/°C
SW2 SW4: library part SW_OMRON_A6S-4102-H, "4 Ways SPST DIP Switch", Manufacturer=OMRON, Manufacturer Part Number=A6S-4102-H, Author="CERN DEM JMW", Component Type=Standard, ComponentHeight=3.8mm, CreateDate=25.09.2008, Family=Switch, HelpURL=\\cern.ch\dfs\Applications\Altium\Datasheets\SW_OMRON_A6S-4102-H.pdf, LatestRevisionDate=25.09.2008, Mounted=Yes, PackageDescription="Pitch 2.54mm, Body 11.3x6.4mm, 4 Ways SPST Surface-Mounting DIP Switch, OMRON A6S-H", Part Description="4 Ways SPST DIP Switch, White Flat Actuator with Seal Tape, Contact Rating 25mA 24VDC", Part Number=SW_OMRON_A6S-4102-H, Pin Count=8, PressFit=No, Sense=No, SMD=Yes, Socket=No, Status=None
T3 T4 T5 T6 T7 T8 T9 T10 T11 T12 T13 T14 T15 T16: "N-CHANNEL MOSFET WITH DIODE", Case=SOT23-3, Manufacturer="ON SEMICONDUCTOR", Author="CERN DEM JLC", Bonding=No, Component Type=Standard, ComponentHeight=1.11mm, CreateDate=23.03.2009, Device=BSS138LT1G, HelpURL=\\cern.ch\dfs\Applications\Altium\Datasheets\BSS138LT1G.pdf, LatestRevisionDate=23.03.2009, Manufacturer Part Number=BSS138LT1G, Mounted=Yes, PackageDescription="SOT23 3-Leads, Pitch 0.95mm - Body 1.4x3mm, IPC Medium Density", Part Description="50V 200mA N-Channel Enhancement Mode Field-Effect Transistor", Part Number=BSS138LT1G, Pin Count=3, PressFit=No, Sense=No, SMD=Yes, Socket=No
WASHER5 WASHER6 WASHER7 WASHER8: library part Keystone_7687, "SMA_Shoulder Washer", Manufacturer="Custom 3D", Author=GK, Component Type=Mechanical, ComponentHeight=1.91mm, CreateDate=28.01.2016, HelpURL=\\cern.ch\dfs\Applications\Altium\Datasheets\AAVID-THERMALLOY_7721-7PPSG.pdf, LatestRevisionDate=28.01.2016, Manufacturer Part Number="Custom 3D", Mounted=Yes, PackageDescription="Polyphenylene Sulfide PPS Shoulder Washer", Part Description="Polyphenylene Sulfide PPS Shoulder Washer", Part Number="Custom 3D", Pin Count=0, PressFit=No, Sense=No, SMD=No, Socket=No, Status=None

## Free pads (board coordinates)
  round 6.4 hole 3.2 paste-2539.97 mask+0.051: MHx(41.65,11.875)
  round 7 hole 3.2 paste-2539.97 mask+0.051: MHx1(41.65,75)

## Via types
v1: diameter 0.5, hole 0.2, Top Layer to Bottom Layer, tented both sides, 131 vias
v2: diameter 0.8, hole 0.3, Top Layer to Bottom Layer, tented both sides, 8 vias

## Nets (pads, with @x,y where several pads share a name; then routed paths per layer and width w, separated by ;. In a path a pad name is that pad's centre, name@x,y a point inside that pad or via, vN(x,y) a via of type N, cw(c..) or ccw(c..) an arc to the next point about the centre after c; other vN are vias at no path point)
DIR8_11: J1.9 R97.2 T8.1 T9.1 | length 34.9
  Top Layer w0.3: T9.1 9.61,68.81 9.382,68.81 9.382,71.736 9.616,71.97 R97.2 10.58,72.4 T8.1 13,74 v1(16,74) ; v1(16,84.5) 25.35,84.5 J1.9
  Bottom Layer w0.3: v1(16,74) v1(16,84.5)
DIR12_15: J1.29 R198.2 T15.1 T16.1 | length 103.9
  Top Layer w0.3: T16.1 9.5,28.2 9.5,28.975 9.5,30.816 9.654,30.97 R198.2 10.63,31.45 T15.1 12.89,32.84 13.34,32.84 v1(14,33.5) ; v1(19.5,33.5) 29.5,33.5 41.5,33.5 v1(42,34)
  Bottom Layer w0.3: v1(14,33.5) v1(19.5,33.5) ; v1(42,34) 44,36 44,60.5 37.5,67 37.5,77 41.5,81 47.25,81 J1.29
GND_ISO3: C4.1 C5.1 C6.1 C75.1 C76.1 C77.1 C78.1 D4.1 D9.1 IC30.1 IC35.2 IC35.5 IC35.8 IC35.11 J1.2 J1.4 J1.6 J1.8 J1.10 J1.11 J1.15 J2.2 J3.2 J4.2 J5.2 LD1.1 LD1.3 LD3.1 LD3.3 R58.1 R63.1 R69.1 R75.1 R80.1 R93.2 R94.2 R95.2 R96.2 R97.1 T3.2 T4.2 T5.2 T6.2 T7.2 T8.2 T9.2 | length 70.6
  Top Layer w0.3: R80.1 T6.2 v1(7.15,48.75) ; R69.1 T4.2 6.995,69.25 v1(7,69.245) ; R75.1 9.479,58.861 10.511,58.861 T5.2 10.374,59 10.161,58.787 v1(10.161,58.228) ; R63.1 T3.2 11.487,79.5 11.495,79.492 v1(11.5,79.492) ; T9.2 10.559,67.05 v1(10.6,67.091) ; R97.1 10.17,71.03 10.39,71.25 v1(11.15,71.25) 11.15,70.675 11.325,70.5 T8.2 ; v1(12.65,65.75) 13.407,66.507 13.407,66.875 13.582,67.05 T7.2 ; v1(24.5,74) 25.05,73.45 IC30.1 26.73,73.47 R58.1 ; C78.1 v1(29.9,50.95) ; R93.2 v1(30.9,51) ; C77.1 v1(32.4,51) ; R94.2 v1(33.4,51) ; C76.1 v1(34.9,51) ; R95.2 v1(35.9,51) ; C75.1 v1(37.4,51) ; R96.2 v1(38.4,51)
  Top Layer w0.7: J5.2@-3.8,47.507 -3.157,48.15 v1(-1.227,48.15) ; J5.2@-3.8,54.492 -3.058,53.75 v1(-1.227,53.75) ; J3.2@-3.8,68.007 -3.143,67.35 v1(-1.327,67.35) ; J3.2@-3.8,74.992 -3.058,74.25 v1(-1.127,74.25)
  Bottom Layer w0.3: D9.1 10.9,54.475 v1(10.931,54.444) ; D4.1 11.5,75.5 v1(12,75.5) ; v1(12.573,69.65) 12.683,69.54 IC35.11 ; v1(12.65,65.75) 12.67,65.73 IC35.8 ; v1(12.773,58.15) 12.813,58.11 IC35.2 ; v1(12.773,61.85) 12.843,61.92 IC35.5 ; C5.1 26.4,61.4 v1(26.5,61.5) ; C6.1 26.45,67.95 v1(26.5,68) ; v1(29.199,82.301) C4.1 ; v1(29.354,80.856) v1(29.354,80.856) C4.1 ; v1(30.778,80.722) C4.1
  Bottom Layer w0.7: v1(-1.327,67.35) -3.143,67.35 -3.8,68.007 -3.257,68.55 v1(-1.327,68.55) ; v1(-1.227,46.75) -3.043,46.75 -3.8,47.507 -3.157,48.15 v1(-1.227,48.15) ; v1(-1.227,53.75) -3.058,53.75 -3.8,54.492 -3.242,55.05 v1(-1.127,55.05) ; v1(-1.127,74.25) -3.058,74.25 -3.8,74.992 -3.342,75.45 v1(-1.127,75.45)
GND_ISO4: C1.1 C2.1 C3.1 C96.1 C97.1 C98.1 C99.1 D13.1 D14.1 IC44.1 IC48.2 IC48.5 IC48.8 IC48.11 J1.16 J1.20 J1.22 J1.24 J1.26 J1.28 J1.30 J11.2 J12.2 J13.2 J14.2 LD6.1 LD6.3 LD7.1 LD7.3 R100.1 R104.1 R112.1 R118.1 R124.1 R191.2 R192.2 R195.2 R196.2 R198.1 T10.2 T11.2 T12.2 T13.2 T14.2 T15.2 T16.2 | length 67.5
  Top Layer w0.3: R112.1 T11.2 v1(7.15,28.25) ; R124.1 T13.2 v1(7.15,7.75) ; R118.1 T12.2 v1(11.65,18) ; R104.1 T10.2 v1(11.4,38.5) ; T16.2 9.802,25.998 v1(10.6,25.998) ; R198.1@10.17,30.03 10.39,30.25 v1(11.15,30.25) 11.161,30.239 11.161,29.725 11.336,29.55 T15.2 ; v1(12.65,25.75) 13.25,25.75 13.55,26.05 T14.2 ; R191.2 v1(17.59,51) ; C99.1 v1(18.59,51) ; R192.2 v1(20.09,51) ; C98.1 v1(21.09,51) ; R195.2 v1(22.59,51) ; C97.1 v1(23.59,51) ; v1(24.9,32.5) 24.93,32.47 R100.1 26.98,32.47 IC44.1 ; R196.2 v1(25.09,51) ; C96.1 v1(26.09,51)
  Top Layer w0.7: J14.2@-3.8,6.508 -3.743,6.45 v1(-1.127,6.45) ; J14.2@-3.8,13.493 -2.958,12.65 v1(-1.227,12.65) ; J12.2@-3.8,27.007 -3.043,26.25 v1(-1.327,26.25) ; J12.2@-3.8,33.992 -2.958,33.15 v1(-1.327,33.15)
  Bottom Layer w0.3: v1(12.673,21.15) 12.693,21.17 IC48.5 ; v1(12.673,24.95) 12.703,24.98 IC48.8 ; v1(12.673,28.75) 12.713,28.79 IC48.11 ; v1(12.773,17.35) 12.783,17.36 IC48.2 ; v1(24.9,32.5) v1@24.923,32.5 ; C2.1 26.153,20.95 v1(26.157,20.954) ; C3.1 25.678,27 25.791,27.113 v1(26.207,27.113) ; v1(33.227,81.339) 33.339,81.339 33.727,81.727 C1.1 34.227,81.227 v1(33.715,80.715)
  Bottom Layer w0.7: v1(-1.327,13.95) -3.8,13.95 -3.8,13.493 -3.8,12.65 v1(-1.227,12.65) ; v1(-1.327,26.25) -3.043,26.25 -3.8,27.007 -3.157,27.65 v1(-1.327,27.65) ; v1(-1.327,33.15) -2.958,33.15 -3.8,33.992 -3.242,34.55 v1(-1.327,34.55) ; v1(-1.127,6.45) -2.048,6.47 -2.055,6.47 -3.8,6.508 -3.8,7.55 v1(-1.127,7.55) ; D14.1 10.673,14.327 v1(10.673,13.45) ; D13.1 10.673,34.827 v1(10.673,33.95)
IO8: D4.3 J2.1 R60.1 R62.2 | length 13.1
  Top Layer w0.5: J2.1@0.7,81.75 v2(4.4,81.75) R60.1
  Bottom Layer w0.3: R62.2 5.65,79.25 6.4,78.5 9.3,78.5 9.45,78.35 D4.3
  Bottom Layer w0.5: v2(4.4,81.75) R62.2
IO9: D4.2 J3.1 R65.1 R68.2 | length 18.1
  Top Layer w0.5: J3.1@-3.75,71.5 v2(-0.05,71.5) R65.1
  Bottom Layer w0.3: R68.2 1.15,71.55 1.15,74.25 2.4,75.5 9.3,75.5 9.45,75.65 D4.2
  Bottom Layer w0.5: v2(-0.05,71.5) R68.2
IO10: D9.3 J4.1 R72.1 R74.2 | length 13
  Top Layer w0.5: J4.1@0.7,61.25 v2(4.4,61.25) R72.1
  Bottom Layer w0.3: R74.2 5.65,58.5 6.15,58 9.05,58 9.2,57.85 D9.3
  Bottom Layer w0.5: v2(4.4,61.25) R74.2
IO11: D9.2 J5.1 R78.1 R79.2 | length 18.1
  Top Layer w0.5: J5.1@-3.75,51 v2(-0.05,51) R78.1
  Bottom Layer w0.3: R79.2 1.2,54.3 1.9,55 9.05,55 9.2,55.15 D9.2
  Bottom Layer w0.5: v2(-0.05,51) R79.2
IO12: D13.3 J11.1 R102.1 R105.2 | length 12.6
  Top Layer w0.5: J11.1@0.7,40.75 v2(4.4,40.75) R102.1
  Bottom Layer w0.3: R105.2 5.65,38.25 6.4,37.5 8.8,37.5 8.95,37.35 D13.3
  Bottom Layer w0.5: v2(4.4,40.75) R105.2
IO13: D13.2 J12.1 R107.1 R111.2 | length 17.8
  Top Layer w0.5: J12.1 v2(-0.1,30.5) R107.1
  Bottom Layer w0.5: v2(-0.1,30.5) R111.2 1.15,33.75 1.9,34.5 8.6,34.5 8.7,34.6 8.9,34.6 8.95,34.65 D13.2
IO14: D14.3 J13.1 R115.1 R117.2 | length 12.6
  Top Layer w0.5: J13.1@0.7,20.25 v2(4.4,20.25) R115.1
  Bottom Layer w0.3: R117.2 5.65,17.75 6.4,17 8.8,17 8.95,16.85 D14.3
  Bottom Layer w0.5: v2(4.4,20.25) R117.2
IO15: D14.2 J14.1 R122.1 R123.2 | length 17.8
  Top Layer w0.5: J14.1@-3.75,10 v2(-0.05,10) R122.1
  Bottom Layer w0.3: R123.2 1.2,13.3 1.9,14 8.8,14 8.95,14.15 D14.2
  Bottom Layer w0.5: v2(-0.05,10) R123.2
LED8: LD1.4 R83.2 | length 2
  Top Layer w0.15: R83.2 LD1.4
LED9: LD1.2 R84.2 | length 2
  Top Layer w0.15: LD1.2 2.07,75.08 R84.2
LED10: LD3.4 R86.2 | length 2
  Top Layer w0.15: R86.2 LD3.4
LED11: LD3.2 R89.2 | length 2
  Top Layer w0.15: LD3.2 2.07,54.58 R89.2
LED12: LD6.4 R160.2 | length 2
  Top Layer w0.15: R160.2 LD6.4
LED13: LD6.2 R166.2 | length 2
  Top Layer w0.15: LD6.2 2.07,34.08 R166.2
LED14: LD7.4 R179.2 | length 2.1
  Top Layer w0.15: LD7.4 7.15,13.8 7.43,13.52 R179.2
LED15: LD7.2 R182.2 | length 2.1
  Top Layer w0.15: LD7.2 2.07,13.83 2.165,13.735 2.185,13.735 2.4,13.52 R182.2
NetIC30_2: IC30.2 IC35.13 R58.2 | length 5.6
  Top Layer w0.3: R58.2 25.4,71.75 25.6,71.55 IC30.2
  Top Layer w0.4: R58.2 25.4,71.6 v1(25.5,71.5)
  Bottom Layer w0.4: IC35.13@23.477,70.837 24.837,70.837 v1(25.5,71.5)
NetIC35_1: IC35.1 IC35.3 R78.2 R80.2 | length 23.1
  Top Layer w0.3: R80.2 3.9,50.7 R78.2 4.275,51.075 v1(4.275,52.875)
  Bottom Layer w0.3: v1(4.275,52.875) 12.875,52.875 13.5,53.5 13.5,56.84 IC35.1 15.474,56.84 15.65,57.016 15.65,59.204 15.474,59.38 IC35.3
NetIC35_4: IC35.4 IC35.6 R72.2 R75.2 | length 14.9
  Top Layer w0.3: R75.2 8.4,61 R72.2 8.9,61.5 v1(8.9,63.125)
  Bottom Layer w0.3: v1(8.9,63.125) 8.965,63.19 IC35.6 15.474,63.19 15.65,63.014 15.65,60.826 15.474,60.65 IC35.4
NetIC35_7: IC35.7 IC35.9 R65.2 R69.2 | length 20.4
  Top Layer w0.3: v1(3.15,69.25) R69.2 3.9,71.2 R65.2
  Bottom Layer w0.3: v1(3.15,69.25) 4.525,69.25 5.4,68.375 10.825,68.375 12.2,67 IC35.9 15.474,67 15.65,66.824 15.65,64.636 15.474,64.46 IC35.7
NetIC35_10: IC35.10 IC35.12 R60.2 R63.2 | length 23.9
  Top Layer w0.3: v1(7.775,79.5) R63.2 8.4,81.5 R60.2
  Bottom Layer w0.3: v1(7.775,79.5) 10.411,79.5 11.072,80.161 12.1,80.161 12.65,79.611 12.65,71 12.84,70.81 IC35.12 15.474,70.81 15.65,70.634 15.65,68.446 15.474,68.27 IC35.10
NetIC35_24: IC35.24 R90.1 T7.1 T8.3 | length 29.9
  Top Layer w0.3: T7.1 13.7,69 T8.3 13.5,71.65 v1(13.5,72.5) R90.1 ; v1(21.5,72.5) 21.973,72.027 21.973,58.25 v1(21.973,56.85)
  Bottom Layer w0.3: v1(13.5,72.5) v1(21.5,72.5) ; v1(21.973,56.85) 21.983,56.84 IC35.24
NetIC44_2: IC44.2 IC48.13 R100.2 | length 6.4
  Top Layer w0.3: v1(25.473,29.75) 26.773,29.75 26.973,29.95 26.973,30.523 IC44.2 26.1,30.55 25.684,30.966 25.684,31.496 R100.2
  Bottom Layer w0.3: IC48.13 25.163,30.06 v1(25.473,29.75)
NetIC48_1: IC48.1 IC48.3 R122.2 R124.2 | length 23
  Top Layer w0.3: R124.2 3.9,9.7 R122.2 4.15,10.05 v1(4.15,12)
  Bottom Layer w0.3: v1(4.15,12) 11.4,12 12.4,13 12.4,15.75 12.74,16.09 IC48.1 15.447,16.09 15.652,16.295 15.652,18.454 15.477,18.63 IC48.3
NetIC48_4: IC48.4 IC48.6 R115.2 R118.2 | length 15.2
  Top Layer w0.3: R118.2 8.4,20 R115.2 v1(8.65,22.25)
  Bottom Layer w0.3: v1(8.65,22.25) 8.84,22.44 IC48.6 14.231,22.359 15.474,22.359 15.65,22.183 15.65,20.187 15.474,20.011 14.261,20.011 IC48.4
NetIC48_7: IC48.7 IC48.9 R107.2 R112.2 | length 20.6
  Top Layer w0.3: v1(2.9,28.25) R112.2 3.71,29.285 4.15,29.725 R107.2
  Bottom Layer w0.3: v1(2.9,28.25) 6.25,28.25 7.5,27 12.226,27 12.895,26.331 14.069,26.331 14.151,26.249 15.474,26.249 15.65,26.073 15.65,24 15.423,23.773 14.213,23.773 IC48.7
NetIC48_10: IC48.10 IC48.12 R102.2 R104.2 | length 23.5
  Top Layer w0.3: v1(7.65,38.5) R104.2 8.4,40.5 R102.2
  Bottom Layer w0.3: v1(7.65,38.5) 10.15,38.5 10.9,39.25 11.9,39.25 12.44,38.71 12.44,31.07 13.45,30.06 15.474,30.06 15.65,29.884 15.65,27.696 15.474,27.52 IC48.10
NetIC48_24: IC48.24 R189.1 T14.1 T15.3 | length 30.9
  Top Layer w0.3: T14.1 13.75,30.45 T15.3 13.5,30.8 v1(13.5,32) 14.18,32 R189.1 ; v1(21.5,32) 21.873,31.627 21.873,17.873 v1(21.873,16.05)
  Bottom Layer w0.3: v1(13.5,32) v1(21.5,32) ; v1(21.873,16.05) 21.913,16.09 IC48.24
NetLD2_1: LD2.1 R87.2 | length 2.1
  Top Layer w0.15: LD2.1 -0.47,67.853 R87.2
NetLD2_3: LD2.3 R88.2 | length 2
  Top Layer w0.15: LD2.3 4.61,67.96 R88.2
NetLD8_1: LD8.1 R183.2 | length 2.1
  Top Layer w0.15: LD8.1 -0.47,26.852 R183.2
NetLD8_3: LD8.3 R184.2 | length 2
  Top Layer w0.15: LD8.3 4.61,26.96 R184.2
NetR62_1: R62.1 T3.3 | length 5.2
  Top Layer w0.3: v1(9.85,80.5) 9.9,80.5 9.95,80.45 T3.3@12.9,80.45
  Bottom Layer w0.3: R62.1 8.65,80.975 9.075,80.55 9.3,80.55 9.35,80.5 v1(9.85,80.5)
NetR68_1: R68.1 T4.3 | length 5.2
  Top Layer w0.3: v1(5.4,70.25) 5.45,70.25 5.5,70.2 T4.3
  Bottom Layer w0.3: R68.1 4.2,70.725 4.625,70.3 4.85,70.3 4.9,70.25 v1(5.4,70.25)
NetR74_1: R74.1 T5.3 | length 5.2
  Top Layer w0.3: v1(9.85,60) 9.9,60 9.95,59.95 T5.3@12.9,59.95
  Bottom Layer w0.3: R74.1 8.65,60.475 9.075,60.05 9.3,60.05 9.35,60 v1(9.85,60)
NetR79_1: R79.1 T6.3 | length 5.2
  Top Layer w0.3: v1(5.4,49.75) 5.45,49.75 5.5,49.7 T6.3
  Bottom Layer w0.3: R79.1 4.2,50.225 4.625,49.8 4.85,49.8 4.9,49.75 v1(5.4,49.75)
NetR87_1: R87.1 T9.3 | length 11.9
  Top Layer w0.15: R87.1 0.632,68 3.65,68 4.274,68.624 6.026,68.624 6.4,68.25 11.8,68.25 T9.3
NetR88_1: R88.1 T7.3 | length 11.1
  Top Layer w0.15: R88.1 5.59,67.98 5.805,67.765 5.878,67.765 5.893,67.75 10.798,67.75 11.298,67.25 12.65,67.25 13.4,68 T7.3
NetR105_1: R105.1 T10.3 | length 5.2
  Top Layer w0.3: v1(9.85,39.5) 9.9,39.5 9.95,39.45 T10.3@12.9,39.45
  Bottom Layer w0.3: R105.1 8.65,39.975 9.075,39.55 9.3,39.55 9.35,39.5 v1(9.85,39.5)
NetR111_1: R111.1 T11.3 | length 5.2
  Top Layer w0.3: v1(5.35,29.25) 5.4,29.25 5.45,29.2 T11.3@8.4,29.2
  Bottom Layer w0.3: R111.1 4.15,29.725 4.575,29.3 4.8,29.3 4.85,29.25 v1(5.35,29.25)
NetR117_1: R117.1 T12.3 | length 5.2
  Top Layer w0.3: v1(9.85,19) 9.9,19 9.95,18.95 T12.3@12.9,18.95
  Bottom Layer w0.3: R117.1 8.65,19.475 9.075,19.05 9.3,19.05 9.35,19 v1(9.85,19)
NetR123_1: R123.1 T13.3 | length 5.2
  Top Layer w0.3: v1(5.4,8.75) 5.45,8.75 5.5,8.7 T13.3
  Bottom Layer w0.3: R123.1 4.2,9.225 4.625,8.8 4.85,8.8 4.9,8.75 v1(5.4,8.75)
NetR183_1: R183.1 T16.3 | length 11.9
  Top Layer w0.15: R183.1 0.625,27.027 0.84,27.242 0.86,27.242 1.239,27.621 6.279,27.621 6.673,27.227 11.823,27.227 T16.3
NetR184_1: R184.1 T14.3 | length 11.1
  Top Layer w0.15: R184.1 5.59,26.98 5.805,26.765 5.825,26.765 5.84,26.75 10.9,26.75 11.4,26.25 12.65,26.25 13.4,27 T14.3
P5V0_ISO3: C4.2 C5.2 C6.2 D4.4 D9.4 IC30.3 IC35.16 IC35.21 J1.12 J1.13 J1.14 LD2.2 LD2.4 R90.2 SW2.1 SW2.2 SW2.3 SW2.4 | length 18.8
  Top Layer w0.3: v1(28,72.5) IC30.3
  Top Layer w0.5: R90.2 17,72.5 17.5,73 v1(17.5,73.5) ; SW2.1 v1(30.34,39.783) ; SW2.2 v1(32.88,39.783) ; SW2.3 v1(35.42,39.783) ; SW2.4 v1(37.96,39.783)
  Bottom Layer w0.3: v1(10.673,78.55) 10.95,78.55 11,78.5 11.2,78.5 11.35,78.35 D4.4 ; v1(11.073,56.784) 11.1,56.811 D9.4 ; IC35.21 C5.2@25.35,60.65 ; IC35.16 23.5,67.05 C6.2 v1(26.5,67.05) ; C5.2 v1(26.5,60.5) ; v1(30.54,83.543) 30.54,83.506 C4.2 v1(32,83.5)
  other v1: 23,78.5
P5V0_ISO4: C1.2 C2.2 C3.2 D13.4 D14.4 IC44.3 IC48.16 IC48.21 J1.17 J1.18 J1.19 LD8.2 LD8.4 R189.2 SW4.1 SW4.2 SW4.3 SW4.4 | length 21.4
  Top Layer w0.3: SW4.1 v1(18.03,39.833) ; SW4.2 v1(20.57,39.833) ; SW4.3 v1(23.11,39.833) ; SW4.4 v1(25.65,39.833) ; IC44.3 29.366,31.434 29.366,30.784 v1(29.4,30.75)
  Bottom Layer w0.3: LD8.2 3.57,26.5 5.65,26.5 LD8.4 ; v1(10.273,37.35) 10.7,37.35 10.85,37.2 D13.4 ; D14.4 v1(11.673,16.65) ; IC48.21 23.6,20.05 C2.2 25.9,20.05 26.02,20.05 v1(26.1,20.13) ; IC48.16 C3.2 26.137,26.25 v1(26.161,26.273) ; v1(36,84) 35.5,83.5 C1.2 36,83 v1(36.5,83.5)
TERM_IO8: C75.2 R83.1 R96.1 SW2.5 T3.1 | length 70.6
  Top Layer w0.3: R83.1 10.59,77.5 13.5,77.5 14.5,76.5 v1(20.5,76.5) 24,73 24,59 25,58 28.5,58 32,54.5 33,53.5 35.45,53.5 36.622,52.328 36.622,49.551 36.773,49.4 C75.2 37.4,48.01 SW2.5 38.4,47.89 R96.1 ; T3.1 20.1,81.4 v1(20.5,81)
  Bottom Layer w0.3: v1(20.5,76.5) v1(20.5,81)
TERM_IO9: C76.2 R84.1 R95.1 SW2.6 T4.1 | length 60.6
  Top Layer w0.3: R84.1 5,75 6.15,73.85 ; T4.1 6.15,73.85 ; R95.1 35.9,47.93 SW2.6 34.9,47.97 C76.2 34.377,49.4 34.227,49.551 34.227,51.773 33.649,52.351 32.649,52.351 31.5,53.5 28,57 24,57 23,58 23,72.5 20,75.5 13,75.5 11.35,73.85 6.15,73.85
TERM_IO10: C77.2 R86.1 R94.1 SW2.7 T5.1 | length 42.5
  Top Layer w0.3: 8.5,56 8.09,55.59 R86.1 9.09,53.5 v1(12,53.5) 27.5,53.5 28.5,52.5 31,52.5 31.671,51.829 31.671,49.678 31.849,49.5 32.3,49.5 C77.2 32.4,47.93 SW2.7 33.4,47.97 R94.1 ; T5.1 10.75,61 v1(12,61)
  Bottom Layer w0.3: v1(12,53.5) 12,58.155 v1(12,61)
TERM_IO11: C78.2 R89.1 R93.1 SW2.8 T6.1 | length 36.9
  Top Layer w0.3: R89.1 5,54.5 6.15,53.35 T6.1 7.15,50.65 9,52.5 27,52.5 28.5,51 28.5,50 29.15,49.35 C78.2 29.9,47.89 SW2.8 30.9,48.01 R93.1
TERM_IO12: C96.2 R160.1 R196.1 SW4.5 T10.1 | length 37.7
  Top Layer w0.3: R160.1 9.09,35 11.5,35 13.815,37.315 13.815,39.966 13.381,40.4 T10.1 10.4,41.9 13,44.5 24.5,44.5 25.65,45.65 SW4.5 ; R196.1 25.09,48.06 SW4.5 ; C96.2 26.09,47.94 SW4.5
TERM_IO13: C97.2 R166.1 R195.1 SW4.6 T11.1 | length 39.1
  Top Layer w0.3: R166.1 4.5,34 6.15,32.35 ; T11.1 6.15,32.35 ; R195.1 22.59,48.02 SW4.6 ; v1(23,43.5) 16,43.5 14.762,42.262 14.762,36.262 11.5,33 6.8,33 6.15,32.35 ; v1(23,46) 23.11,46.11 SW4.6 ; C97.2 23.59,47.98 SW4.6
  Bottom Layer w0.3: v1(23,43.5) v1(23,46)
TERM_IO14: C98.2 R179.1 R192.1 SW4.7 T12.1 | length 61.2
  Top Layer w0.3: R179.1 9,14.13 9,15 9.5,15.5 15.5,15.5 16.5,16.5 16.5,18.8 15.4,19.9 T12.1 10.65,23.15 11.5,24 16.5,24 17.5,25 17.5,32 15.65,33.85 15.65,41.65 16.5,42.5 v1(20.5,42.5) ; R192.1 20.09,47.98 SW4.7 ; v1(20.5,46) 20.5,47.43 SW4.7 ; C98.2 21.09,48.02 SW4.7
  Bottom Layer w0.3: v1(20.5,42.5) v1(20.5,46)
TERM_IO15: C99.2 R182.1 R191.1 SW4.8 T13.1 | length 60.1
  Top Layer w0.3: R182.1 5,13.5 6.15,12.35 T13.1 7.65,9.65 8,10 8,12 8.5,12.5 15.5,12.5 17.5,14.5 17.5,23.5 18.5,24.5 18.5,32.5 16.564,34.436 16.564,41.064 17,41.5 v1(18,41.5) ; R191.1 17.59,47.94 SW4.8 ; v1(18,46) 18,47.47 SW4.8 ; C99.2 18.59,48.06 SW4.8
  Bottom Layer w0.3: v1(18,41.5) v1(18,46)
XIO8: IC35.14 IC35.15 J1.1 | length 26.8
  Bottom Layer w0.3: J1.1 21.5,84.11 21.5,78 26.5,73 26.5,69.494 25.916,68.91 25.025,68.91 ; IC35.15 23.6,68.42 24.535,68.42 25.025,68.91 ; IC35.14 23.6,69.39 24.545,69.39 25.025,68.91
XIO9: IC35.17 IC35.18 J1.3 | length 32
  Bottom Layer w0.3: J1.3 23.5,84.65 23.5,80 29,74.5 29,72.278 29,67.5 26.6,65.1 25.025,65.1 ; IC35.18 23.6,64.61 24.535,64.61 25.025,65.1 ; IC35.17 23.6,65.58 24.545,65.58 25.025,65.1
XIO10: IC35.19 IC35.20 J1.5 | length 34.6
  Bottom Layer w0.3: J1.5 24.5,86.19 24.5,80.5 30,75 30,65.5 27.06,62.56 25.025,62.56 ; IC35.20 23.6,62.07 24.535,62.07 25.025,62.56 ; IC35.19 23.6,63.04 24.545,63.04 25.025,62.56
XIO11: IC35.22 IC35.23 J1.7 | length 38.3
  Bottom Layer w0.3: IC35.23 23.6,58.26 24.535,58.26 25.025,58.75 ; IC35.22 23.6,59.23 24.545,59.23 25.025,58.75 ; J1.7 25.77,80.73 31,75.5 31,62.5 27.25,58.75 25.025,58.75
XIO12: IC48.14 IC48.15 J1.21 | length 80
  Bottom Layer w0.3: IC48.15 23.6,27.67 24.535,27.67 25.025,28.16 ; IC48.14 23.6,28.64 24.545,28.64 25.025,28.16 ; J1.21 41.09,85 39.5,85 33.5,79 33.5,65 40,58.5 40,38 30.16,28.16 25.025,28.16
XIO13: IC48.17 IC48.18 J1.23 | length 84.1
  Bottom Layer w0.3: IC48.18 23.6,23.86 24.535,23.86 25.025,24.35 ; IC48.17 23.6,24.83 24.545,24.83 25.025,24.35 ; J1.23 42.63,84 40,84 34.5,78.5 34.5,65.5 41,59 41,37.5 27.85,24.35 25.025,24.35
XIO14: IC48.19 IC48.20 J1.25 | length 87.7
  Bottom Layer w0.3: IC48.20 23.6,21.32 24.535,21.32 25.025,21.81 ; IC48.19 23.6,22.29 24.545,22.29 25.025,21.81 ; J1.25 44.17,83 40.5,83 35.5,78 35.5,66 42,59.5 42,37 26.81,21.81 25.025,21.81
XIO15: IC48.22 IC48.23 J1.27 | length 92.7
  Bottom Layer w0.3: IC48.23 23.6,17.51 24.535,17.51 25.025,18 ; IC48.22 23.6,18.48 24.545,18.48 25.025,18 ; J1.27 45.71,82 41,82 36.5,77.5 36.5,66.5 43,60 43,36.5 27.5,21 27.5,19.5 26,18 25.025,18
pads on no net: FTG1.FTG2 FTG2.1 FTG3.1 FTG4.1 M1.1 M2.1

## Polygon pours and split planes (outlines as drawn)
GND_ISO4 on Layer 2 "NONET_L-01_P-001" (solid, remove dead copper, pour order 3): 14,51.5 8,45.5 -4.5,45.5 -5,45 -5,5 -4,4 9,4 13,8 45,8 46,9 46,69 59,82 59,90.5 57.5,92 35,92 35,89.5 35.5,89 36.5,89 37.5,88 37.5,86.5 32.5,81.5 32.5,64.5 39,58 39,37 38,36 27.5,36 27,36.5 27,50.5 26,51.5
GND_ISO3 on Layer 2 "NONET_L-01_P-001" (solid, remove dead copper, pour order 2): -4.5,46 -5,46.5 -5,91.5 -4.5,92 34.5,92 34.5,89 35,88.5 36.5,88.5 37,88 37,87 32,82 32,64 38.5,57.5 38.5,37.5 37.5,36.5 28,36.5 27.5,37 27.5,51 26.5,52 13.5,52 7.5,46 1,46
P5V0_ISO4 on Layer 1 "NONET_L-01_P-001" (solid, remove dead copper, pour order 0): 14,51.5 8,45.5 -4.5,45.5 -5,45 -5,5.5 -3.5,4 9,4 13,8 45,8 46,9 46,69 59,82 59,90.5 57.5,92 38,92 37.5,91.5 37.5,88 37.5,86.5 32.5,81.5 32.5,64.5 39,58 39,37 38,36 27.5,36 27,36.5 27,50.5 26,51.5
P5V0_ISO3 on Layer 1 "NONET_L-01_P-001" (solid, remove dead copper, pour order 1): -4.5,46 -5,46.5 -5,91.5 -4.5,92 34,92 34.5,91.5 34.5,89 34.5,84.5 32,82 32,64 38.5,57.5 38.5,37.5 37.5,36.5 28,36.5 27.5,37 27.5,51 26.5,52 13.5,52 7.5,46 1,46

## Keep-outs
Keep-Out Layer:
  the board outline again, w1

## Silkscreen, mask and mechanical layers (free items; w line width, h text height)
Mechanical 1:
  lines w0.15: -6,-2.5 2.5,-2.5 13,8 45,8 46,9 46,69 59,82 59,93 46,93 -6,93 -6,-2.5

## Text inside footprints (layer, text, board x,y; h text height)
J1: Top Overlay "30" at 53.075,91.397 h1.02; Mechanical 14 "30" at 53.075,91.397 h1.02
SW2: Top Overlay "1" at 30.213,40.333 h1; Top Overlay "2" at 32.499,40.333 h1; Top Overlay "ON" at 29.451,44.778 h1; Top Overlay "3" at 35.039,40.333 h1; Top Overlay "4" at 37.579,40.333 h1; Mechanical 14 "1" at 30.213,40.333 h1; Mechanical 14 "2" at 32.499,40.333 h1; Mechanical 14 "ON" at 29.451,44.778 h1; Mechanical 14 "3" at 35.039,40.333 h1; Mechanical 14 "4" at 37.579,40.333 h1
SW4: Top Overlay "4" at 25.269,40.383 h1; Top Overlay "3" at 22.729,40.383 h1; Top Overlay "ON" at 17.141,44.828 h1; Top Overlay "2" at 20.189,40.383 h1; Top Overlay "1" at 17.903,40.383 h1; Mechanical 14 "4" at 25.269,40.383 h1; Mechanical 14 "3" at 22.729,40.383 h1; Mechanical 14 "ON" at 17.141,44.828 h1; Mechanical 14 "2" at 20.189,40.383 h1; Mechanical 14 "1" at 17.903,40.383 h1